# EAGLE board SparkFun_IoT_RedBoard-ESP32-Panel (EAGLE 9.6.2), part 1 of 9
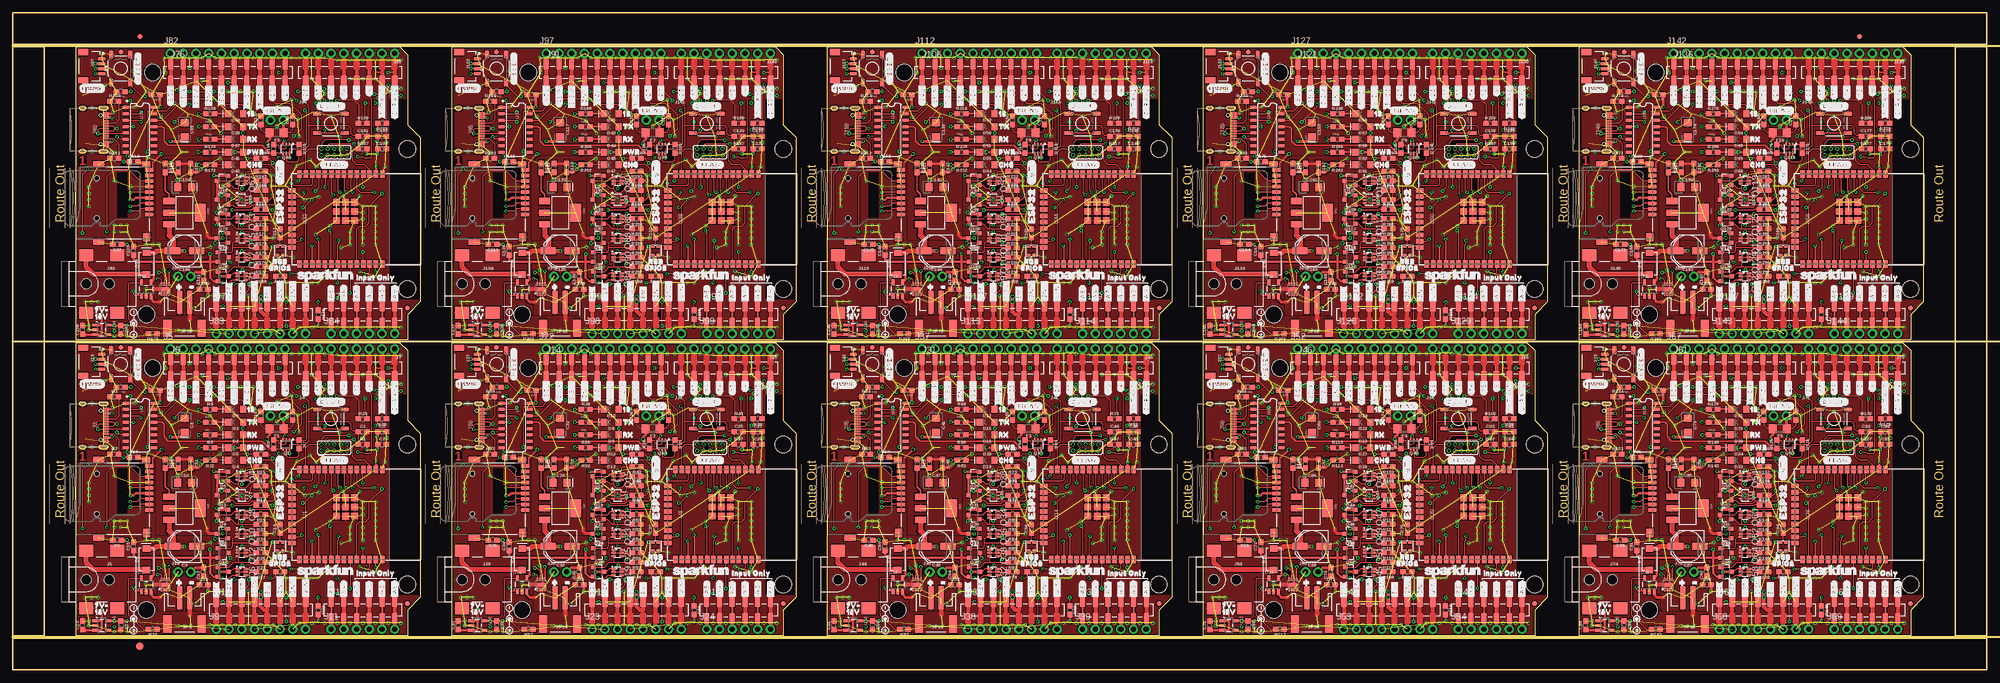
[diagram p0: board, top side]
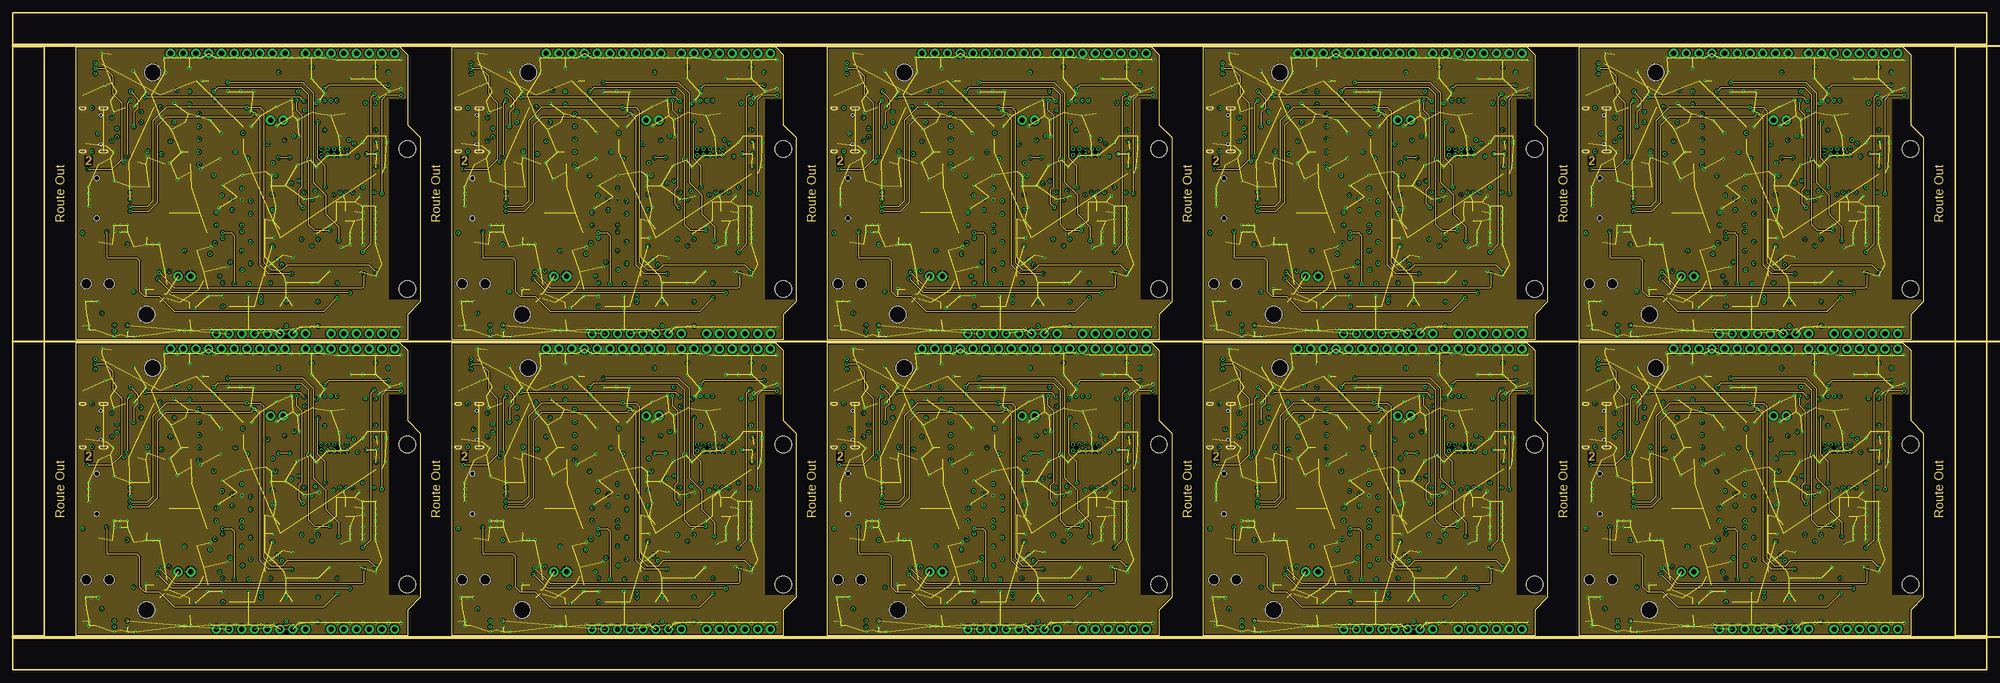
[diagram p1: board, inner layer Route2]
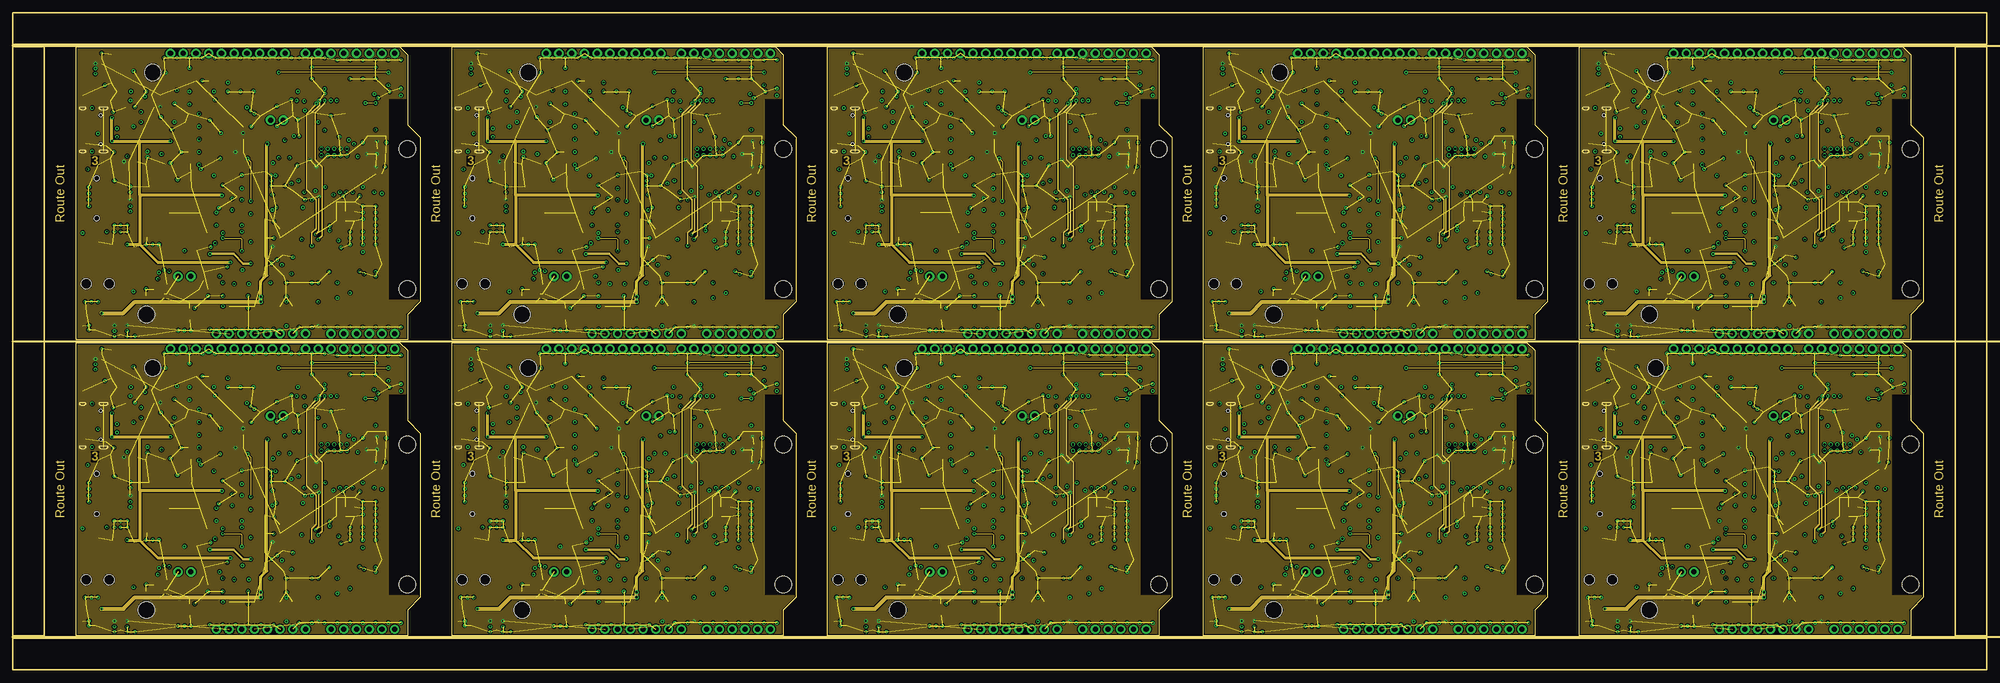
[diagram p2: board, inner layer Route15]
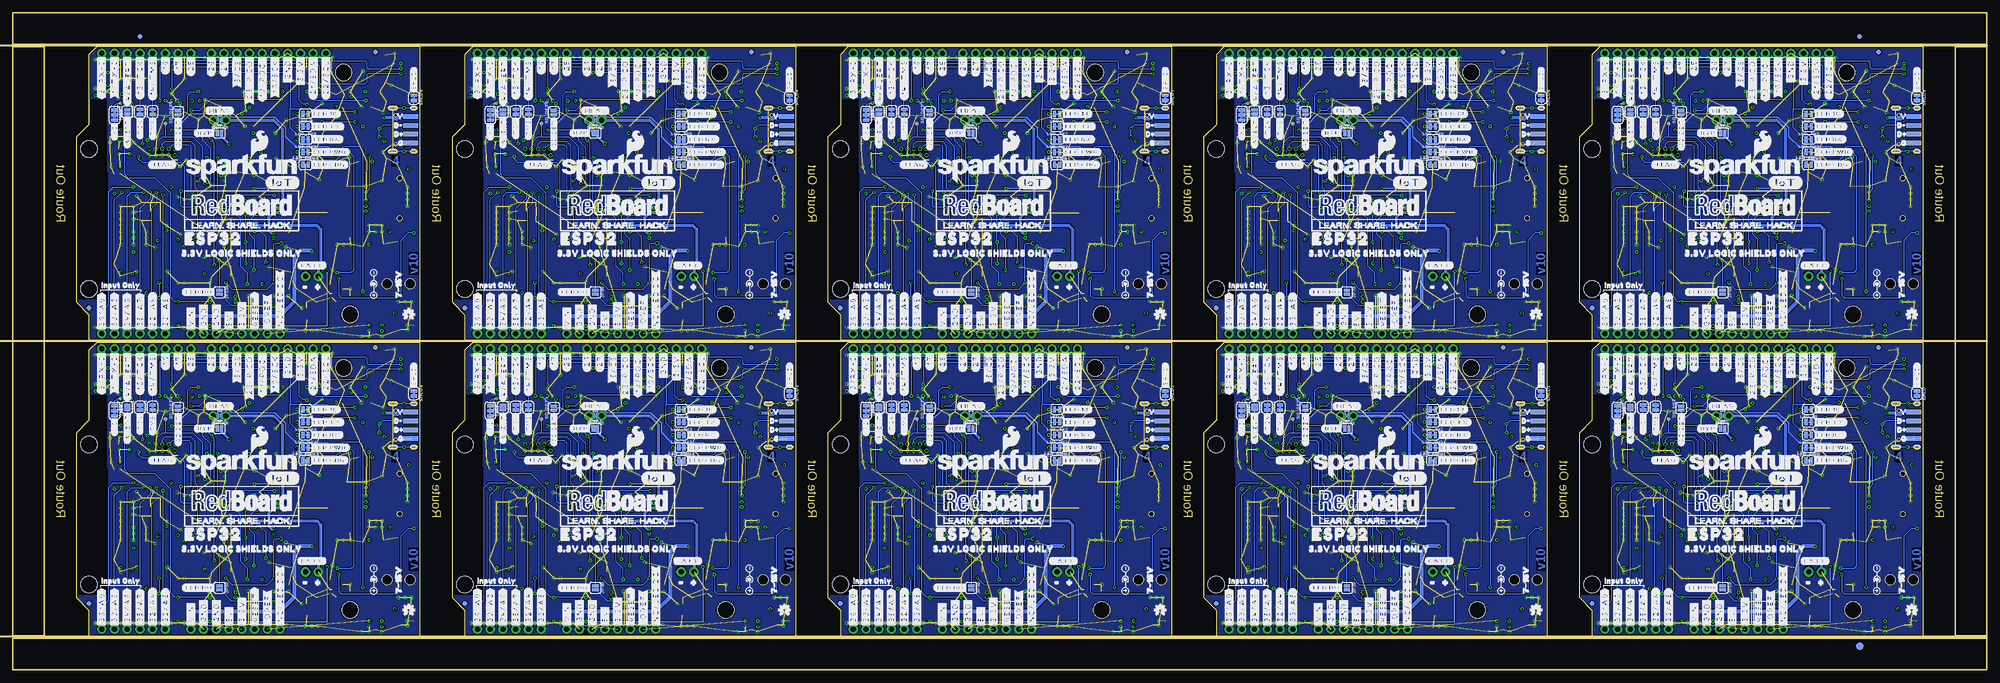
[diagram p3: board, bottom side, seen from below]

Size 393.7 x 131.06 mm. Coordinates in mm from the lower left corner, seen from the top.
Outline: 12.7,65.28 77.22,65.28 78.74,63.75 78.74,49.78 81.28,47.24 81.28,14.48 78.74,11.94 78.74,6.86 12.7,6.86 12.7,65.28
Outline: 87.63,65.28 152.15,65.28 153.67,63.75 153.67,49.78 156.21,47.24 156.21,14.48 153.67,11.94 153.67,6.86 87.63,6.86 87.63,65.28
Outline: 162.56,65.28 227.08,65.28 228.6,63.75 228.6,49.78 231.14,47.24 231.14,14.48 228.6,11.94 228.6,6.86 162.56,6.86 162.56,65.28
Outline: 237.49,65.28 302.01,65.28 303.53,63.75 303.53,49.78 306.07,47.24 306.07,14.48 303.53,11.94 303.53,6.86 237.49,6.86 237.49,65.28
Outline: 312.42,65.28 376.94,65.28 378.46,63.75 378.46,49.78 381,47.24 381,14.48 378.46,11.94 378.46,6.86 312.42,6.86 312.42,65.28
Outline: 12.7,124.21 77.22,124.21 78.74,122.68 78.74,108.71 81.28,106.17 81.28,73.41 78.74,70.87 78.74,65.79 12.7,65.79 12.7,124.21
Outline: 87.63,124.21 152.15,124.21 153.67,122.68 153.67,108.71 156.21,106.17 156.21,73.41 153.67,70.87 153.67,65.79 87.63,65.79 87.63,124.21
Outline: 162.56,124.21 227.08,124.21 228.6,122.68 228.6,108.71 231.14,106.17 231.14,73.41 228.6,70.87 228.6,65.79 162.56,65.79 162.56,124.21
Outline: 237.49,124.21 302.01,124.21 303.53,122.68 303.53,108.71 306.07,106.17 306.07,73.41 303.53,70.87 303.53,65.79 237.49,65.79 237.49,124.21
Outline: 312.42,124.21 376.94,124.21 378.46,122.68 378.46,108.71 381,106.17 381,73.41 378.46,70.87 378.46,65.79 312.42,65.79 312.42,124.21
Outline: 0,6.35 393.7,6.35 393.7,0 0,0 0,6.35
Outline: 387.35,124.21 393.7,124.21 393.7,6.86 387.35,6.86 387.35,124.21
Outline: 0,131.06 393.7,131.06 393.7,124.71 0,124.71 0,131.06
Outline: 0,124.21 6.35,124.21 6.35,6.86 0,6.86 0,124.21
Copper layers (1+2*15+16): Top 0.035559375mm / dielectric 0.47751875mm / Route2 0.035559375mm / dielectric 0.47751875mm / Route15 0.035559375mm / dielectric 0.47751875mm / Bottom 0.035559375mm
Design rules "SparkFun_IoT_RedBoard-ESP32": minimum track width 7mil, minimum drill 12mil, track to track 7mil, track to pad 7mil, pad to pad 7mil, via to via 7mil, smd to smd 7mil, copper to edge 7mil, drill to drill 7mil, minimum pad ring 7mil, minimum via ring 7mil, stop-mask expansion 3mil, vias tented up to drill 25mil, thermal gap 10mil
tRestrict: area 75.2,15 to 81.3,54.9; area 30.4,15.9 to 30.5,16.2; area 150.1,15 to 156.2,54.9; area 105.4,15.9 to 105.5,16.2; area 225,15 to 231.1,54.9; area 180.3,15.9 to 180.4,16.2; area 300,15 to 306.1,54.9; area 255.2,15.9 to 255.3,16.2; area 374.9,15 to 381,54.9; area 330.1,15.9 to 330.3,16.2; area 75.2,73.9 to 81.3,113.8; area 30.4,74.8 to 30.5,75.1; area 150.1,73.9 to 156.2,113.8; area 105.4,74.8 to 105.5,75.1; area 225,73.9 to 231.1,113.8; area 180.3,74.8 to 180.4,75.1; area 300,73.9 to 306.1,113.8; area 255.2,74.8 to 255.3,75.1; area 374.9,73.9 to 381,113.8; area 330.1,74.8 to 330.3,75.1
bRestrict: area 75.2,21.8 to 81.3,40.1; area 75.2,15 to 81.3,54.9; area 150.1,21.8 to 156.2,40.1; area 150.1,15 to 156.2,54.9; area 225,21.8 to 231.1,40.1; area 225,15 to 231.1,54.9; area 300,21.8 to 306.1,40.1; area 300,15 to 306.1,54.9; area 374.9,21.8 to 381,40.1; area 374.9,15 to 381,54.9; area 75.2,80.8 to 81.3,99.1; area 75.2,73.9 to 81.3,113.8; area 150.1,80.8 to 156.2,99.1; area 150.1,73.9 to 156.2,113.8; area 225,80.8 to 231.1,99.1; area 225,73.9 to 231.1,113.8; area 300,80.8 to 306.1,99.1; area 300,73.9 to 306.1,113.8; area 374.9,80.8 to 381,99.1; area 374.9,73.9 to 381,113.8
Milling: 3 lines

## Footprints (pad centres in the part's own frame; a part is rotated, then mirrored left to right if it is on the bottom)
SMT-JUMPER_2_NO_SILK = smd 0.635 x 1.27: 1 -0.406,0; 2 0.406,0
0603 = smd 1.1 x 1: 1 -0.85,0; 2 0.85,0
EIA3216 = smd 1.4 x 1.6: + 1.4,0; - -1.4,0
PANASONIC_D = smd 3 x 1.4: + 2.4,0; - -2.4,0
SMA-DIODE = smd 1.27 x 1.47: A -2.15,0; C 2.15,0
LED-1206 = smd 1.2 x 1.4: A -1.5,0; C 1.5,0
WS2812-2020 = smd 0.7 x 0.7: DI -0.915,0.55; DO 0.915,-0.55; GND 0.915,0.55; VCC -0.915,-0.55
TACTILE_SWITCH_SMD_5.2MM = smd 1.524 x 0.762: 1 -2.794,1.905; 2 2.794,1.905; 3 -2.794,-1.905; 4 2.794,-1.905
FIDUCIAL-1X2 = smd 1 x 1: 1 0,0
FIDUCIAL-1.5X3 = smd 1.5 x 1.5: 1 0,0
1206 = smd 1.6 x 1.8: 1 -1.4,0; 2 1.4,0
SMT-JUMPER_3_2-NC_TRACE_SILK = smd 0.66 x 1.27: 1 -1.041,0; 2 0,0; 3 1.041,0
POWER_JACK_SMD = smd 2.8 x 2.4: GND 0,-5.7; P$4 6.1,-5.7; VIN0 0,5.7; VIN1 6.1,5.7 | hole 2.032: 0,0; 4.572,0
USB-C-16P-4LAYER-ISOLATED = smd 0.3 x 1: A5 -1.25,-0.34; A6 -0.25,-0.34; A7 0.25,-0.34; A8 1.25,-0.34; B5 1.75,-0.34; B6 0.75,-0.34; B7 -0.75,-0.34; B8 -1.75,-0.34 | smd 0.6 x 1: GND -3.225,-0.34; GND2 3.225,-0.34; VBUS1 -2.45,-0.34; VBUS2 2.45,-0.34 | smd 1 x 2.1: SHLD1 -4.32,-0.915; SHLD2 4.32,-0.915 | smd 1 x 2.1 bottom: SHLD3 -4.32,-0.915; SHLD4 4.32,-0.915 | smd 1 x 1.6: SHLD5 -4.32,-5.095; SHLD8 4.32,-5.095 | smd 1 x 1.6 bottom: SHLD6 -4.32,-5.095; SHLD7 4.32,-5.095 | hole 0.65: -2.89,-1.445; 2.89,-1.445
USB-SOLDER-PADS = smd 3 x 0.9: D+ 0,-0.889; D- 0,0.889; GND 0,-2.667; VBUS 0,2.667
2X5_PTH_SILK_.05 = drill 0.432: 1 0,0; 2 0,1.27; 3 1.27,0; 4 1.27,1.27; 5 2.54,0; 6 2.54,1.27; 7 3.81,0; 8 3.81,1.27; 9 5.08,0; 10 5.08,1.27
1X10_NO_SILK = drill 1.016 pad 1.88: 1 0,0; 2 2.54,0; 3 5.08,0; 4 7.62,0; 5 10.16,0; 6 12.7,0; 7 15.24,0; 8 17.78,0; 9 20.32,0; 10 22.86,0
1X10_SMD_COMBINED = smd 1 x 2: 1A 0,1.65; 1B 0,-1.65; 2A 2.54,1.65; 2B 2.54,-1.65; 3A 5.08,1.65; 3B 5.08,-1.65; 4A 7.62,1.65; 4B 7.62,-1.65; 5A 10.16,1.65; 5B 10.16,-1.65; 6A 12.7,1.65; 6B 12.7,-1.65; 7A 15.24,1.65; 7B 15.24,-1.65; 8A 17.78,1.65; 8B 17.78,-1.65; 9A 20.32,1.65; 9B 20.32,-1.65; 10A 22.86,1.65; 10B 22.86,-1.65
1X08_NO_SILK = drill 1.016 pad 1.88: 1 0,0; 2 2.54,0; 3 5.08,0; 4 7.62,0; 5 10.16,0; 6 12.7,0; 7 15.24,0; 8 17.78,0
1X08_SMD_COMBINED = smd 1 x 2: 1 0,1.65; 2 2.54,1.65; 3 5.08,1.65; 4 7.62,1.652; 5 10.16,1.65; 6 12.7,1.652; 7 15.24,1.65; 8 17.78,1.652
1X06_NO_SILK = drill 1.016 pad 1.88: 1 0,0; 2 2.54,0; 3 5.08,0; 4 7.62,0; 5 10.16,0; 6 12.7,0
1X06_SMD_STRAIGHT_COMBO = smd 1 x 2: 1 0,-1.65; 1-2 0,1.65; 2 2.54,1.65; 2-2 2.54,-1.65; 3 5.08,-1.65; 3-2 5.08,1.65; 4 7.62,1.65; 4-2 7.62,-1.65; 5 10.16,-1.65; 5-2 10.16,1.65; 6 12.7,1.65; 6-2 12.7,-1.65
JST04_1MM_RA = smd 0.6 x 1.35: 1 -1.5,0; 2 -0.5,0; 3 0.5,0; 4 1.5,0 | smd 1.2 x 2: NC1 2.8,-3.675; NC2 -2.8,-3.675
MICROSD-EXTERNALPIN = smd 0.7 x 1.6: 1 2.25,10.5; 2 1.15,10.5; 3 0.05,10.5; 4 -1.05,10.5; 5 -2.15,10.5; 6 -3.25,10.5; 7 -4.35,10.5; 8 -5.45,10.5; 9 -6.55,10.5 | smd 1.2 x 1.6: 10 -7.75,9.9 | smd 1.2 x 2.2: 11 -7.75,0.4; 12 7.75,0.4 | smd 1.6 x 1.4: 13 6.85,10 | hole 1: 3.05,0; -4.95,0
1X02_NO_SILK = drill 1.016 pad 1.88: 1 0,0; 2 2.54,0
JST-2-SMD = smd 1 x 4.6: 1 -1,-3.7; 2 1,-3.7 | smd 1.6 x 3.4: NC1 -3.4,1.5; NC2 3.4,1.5
STAND-OFF = hole 3.302: 0,0
SMT-JUMPER_2_NC_TRACE_SILK = smd 0.66 x 1.27: 1 -0.521,0; 2 0.521,0
COMBO-JUMPER_2_NC_TRACE = smd 0.635 x 1.27: 1 -0.508,0; 2 0.508,0 | drill 1.016 pad 1.88: 3 -1.27,0; 4 1.27,0
SC70-6 = smd 0.3 x 0.66: 1 -0.65,-0.92; 2 0,-0.92; 3 0.65,-0.92; 4 0.65,0.92; 5 0,0.92; 6 -0.65,0.92
SOT23-3 = smd 0.8 x 0.9: 1 -0.95,-1; 2 0.95,-1; 3 0,1.1
SOT363_PHILIPS = smd 0.4 x 0.8: 1 -0.65,-0.8; 2 0,-0.8; 3 0.65,-0.8; 4 0.65,0.8; 5 0,0.8; 6 -0.65,0.8
PAD.03X.03 = smd 0.762 x 0.762: 1 0,0
ESP-WROOM-32D = smd 0.9 x 1.5: 1 6.43,9; 2 5.16,9; 3 3.89,9; 4 2.62,9; 5 1.35,9; 6 0.08,9; 7 -1.19,9; 8 -2.46,9; 9 -3.73,9; 10 -5,9; 11 -6.27,9; 12 -7.54,9; 13 -8.81,9; 14 -10.08,9; 25 -10.08,-9; 26 -8.81,-9; 27 -7.54,-9; 28 -6.27,-9; 29 -5,-9; 30 -3.73,-9; 31 -2.46,-9; 32 -1.19,-9; 33 0.08,-9; 34 1.35,-9; 35 2.62,-9; 36 3.89,-9; 37 5.16,-9; 38 6.43,-9 | smd 1.5 x 0.9: 15 -11.57,5.715; 16 -11.57,4.445; 17 -11.57,3.175; 18 -11.57,1.905; 19 -11.57,0.635; 20 -11.57,-0.635; 21 -11.57,-1.905; 22 -11.57,-3.175; 23 -11.57,-4.445; 24 -11.57,-5.715 | smd 1.33 x 1.33: GND -0.912,1.531; GNDT1 -2.751,3.346; GNDT2 -2.761,1.516; GNDT3 -2.751,-0.314; GNDT4 -0.891,-0.324; GNDT5 0.909,-0.314; GNDT6 0.909,1.516; GNDT7 0.909,3.346; GNDT8 -0.921,3.346
SO016 = smd 0.6 x 1.2: 1 -4.445,-2.8; 2 -3.175,-2.8; 3 -1.905,-2.8; 4 -0.635,-2.8; 5 0.635,-2.8; 6 1.905,-2.8; 7 3.175,-2.8; 8 4.445,-2.8; 9 4.445,2.8; 10 3.175,2.8; 11 1.905,2.8; 12 0.635,2.8; 13 -0.635,2.8; 14 -1.905,2.8; 15 -3.175,2.8; 16 -4.445,2.8
SOT223 = smd 1.219 x 2.235: 1 -2.311,-3.099; 2 0,-3.099; 3 2.311,-3.099 | smd 3.6 x 2.2: 4 0,3.099
SOT23-5 = smd 0.55 x 1.2: 1 -0.95,-1.3; 2 0,-1.3; 3 0.95,-1.3; 4 0.95,1.3; 5 -0.95,1.3
DFN-8 = smd 0.3 x 0.7: 1 -0.75,-0.99; 2 -0.25,-0.99; 3 0.25,-0.99; 4 0.75,-0.99; 5 0.75,0.99; 6 0.25,0.99; 7 -0.25,0.99; 8 -0.75,0.99 | smd 1.38 x 0.8: 9 0,0

## Placement (x,y rotation side)
!ALERT!  JUMPER-SMT_2_NO_SILK  [SMT-JUMPER_2_NO_SILK]  71.12,52.32 90 bottom
!ALERT!1  JUMPER-SMT_2_NO_SILK  [SMT-JUMPER_2_NO_SILK]  146.05,52.32 90 bottom
!ALERT!2  JUMPER-SMT_2_NO_SILK  [SMT-JUMPER_2_NO_SILK]  220.98,52.32 90 bottom
!ALERT!3  JUMPER-SMT_2_NO_SILK  [SMT-JUMPER_2_NO_SILK]  295.91,52.32 90 bottom
!ALERT!4  JUMPER-SMT_2_NO_SILK  [SMT-JUMPER_2_NO_SILK]  370.84,52.32 90 bottom
!ALERT!5  JUMPER-SMT_2_NO_SILK  [SMT-JUMPER_2_NO_SILK]  71.12,111.25 90 bottom
!ALERT!6  JUMPER-SMT_2_NO_SILK  [SMT-JUMPER_2_NO_SILK]  146.05,111.25 90 bottom
!ALERT!7  JUMPER-SMT_2_NO_SILK  [SMT-JUMPER_2_NO_SILK]  220.98,111.25 90 bottom
!ALERT!8  JUMPER-SMT_2_NO_SILK  [SMT-JUMPER_2_NO_SILK]  295.91,111.25 90 bottom
!ALERT!9  JUMPER-SMT_2_NO_SILK  [SMT-JUMPER_2_NO_SILK]  370.84,111.25 90 bottom
BYP  JUMPER-SMT_2_NO_SILK  [SMT-JUMPER_2_NO_SILK]  52.7,48.13 0 bottom
BYP1  JUMPER-SMT_2_NO_SILK  [SMT-JUMPER_2_NO_SILK]  127.64,48.13 0 bottom
BYP2  JUMPER-SMT_2_NO_SILK  [SMT-JUMPER_2_NO_SILK]  202.56,48.13 0 bottom
BYP3  JUMPER-SMT_2_NO_SILK  [SMT-JUMPER_2_NO_SILK]  277.5,48.13 0 bottom
BYP4  JUMPER-SMT_2_NO_SILK  [SMT-JUMPER_2_NO_SILK]  352.43,48.13 0 bottom
BYP5  JUMPER-SMT_2_NO_SILK  [SMT-JUMPER_2_NO_SILK]  52.7,107.06 0 bottom
BYP6  JUMPER-SMT_2_NO_SILK  [SMT-JUMPER_2_NO_SILK]  127.64,107.06 0 bottom
BYP7  JUMPER-SMT_2_NO_SILK  [SMT-JUMPER_2_NO_SILK]  202.56,107.06 0 bottom
BYP8  JUMPER-SMT_2_NO_SILK  [SMT-JUMPER_2_NO_SILK]  277.5,107.06 0 bottom
BYP9  JUMPER-SMT_2_NO_SILK  [SMT-JUMPER_2_NO_SILK]  352.43,107.06 0 bottom
C1  0.1uF  [0603]  69.85,47.5 0 top
C2  0.1uF  [0603]  73.66,44.96 0 top
C3  10uF  [0603]  73.66,47.5 0 top
C4  0.1uF  [0603]  55.88,50.67 90 top
C5  0.1uF  [0603]  20.83,25.91 180 top
C6  10uF  [EIA3216]  34.29,48.77 270 top
C7  0.1uF  [0603]  28.57,55.75 180 top
C8  10nF  [0603]  21.59,56.39 180 top
C9  47uF  [PANASONIC_D]  34.29,24.64 180 top
C10  10uF  [EIA3216]  34.29,37.34 0 top
C11  0.1uF  [0603]  35.56,41.15 270 top
C12  0.1uF  [0603]  13.97,8.89 90 top
C13  0.1uF  [0603]  21.59,8.89 270 top
C14  0.1uF  [0603]  53.34,28.13 90 top
C15  4.7uF  [0603]  24.13,24.64 90 top
C16  4.7uF  [0603]  38.1,17.02 0 top
C17  0.1uF  [0603]  38.1,19.56 90 top
C18  0.1uF  [0603]  49.53,50.67 90 top
C19  10uF  [0603]  24.13,42.42 0 top
C20  0.1uF  [0603]  130.81,50.67 90 top
C21  0.1uF  [0603]  95.76,25.91 180 top
C22  10uF  [EIA3216]  109.22,48.77 270 top
C23  10nF  [0603]  96.52,56.39 180 top
C24  0.1uF  [0603]  103.51,55.75 180 top
C25  0.1uF  [0603]  144.78,47.5 0 top
C26  0.1uF  [0603]  148.59,44.96 0 top
C27  10uF  [0603]  148.59,47.5 0 top
C28  10uF  [EIA3216]  109.22,37.34 0 top
C29  0.1uF  [0603]  110.49,41.15 270 top
C30  47uF  [PANASONIC_D]  109.22,24.64 180 top
C31  0.1uF  [0603]  96.52,8.89 270 top
C32  0.1uF  [0603]  88.9,8.89 90 top
C33  4.7uF  [0603]  113.03,17.02 0 top
C34  4.7uF  [0603]  99.06,24.64 90 top
C35  0.1uF  [0603]  113.03,19.56 90 top
C36  0.1uF  [0603]  124.46,50.67 90 top
C37  0.1uF  [0603]  128.27,28.13 90 top
C38  10uF  [0603]  99.06,42.42 0 top
C39  0.1uF  [0603]  205.74,50.67 90 top
C40  0.1uF  [0603]  170.69,25.91 180 top
C41  10uF  [EIA3216]  184.15,48.77 270 top
C42  10nF  [0603]  171.45,56.39 180 top
C43  0.1uF  [0603]  178.44,55.75 180 top
C44  0.1uF  [0603]  219.71,47.5 0 top
C45  0.1uF  [0603]  223.52,44.96 0 top
C46  10uF  [0603]  223.52,47.5 0 top
C47  10uF  [EIA3216]  184.15,37.34 0 top
C48  0.1uF  [0603]  185.42,41.15 270 top
C49  47uF  [PANASONIC_D]  184.15,24.64 180 top
C50  0.1uF  [0603]  171.45,8.89 270 top
C51  0.1uF  [0603]  163.83,8.89 90 top
C52  4.7uF  [0603]  187.96,17.02 0 top
C53  4.7uF  [0603]  173.99,24.64 90 top
C54  0.1uF  [0603]  187.96,19.56 90 top
C55  0.1uF  [0603]  199.39,50.67 90 top
C56  0.1uF  [0603]  203.2,28.13 90 top
C57  10uF  [0603]  173.99,42.42 0 top
C58  0.1uF  [0603]  280.67,50.67 90 top
C59  0.1uF  [0603]  245.62,25.91 180 top
C60  10uF  [EIA3216]  259.08,48.77 270 top
C61  10nF  [0603]  246.38,56.39 180 top
C62  0.1uF  [0603]  253.36,55.75 180 top
C63  0.1uF  [0603]  294.64,47.5 0 top
C64  0.1uF  [0603]  298.45,44.96 0 top
C65  10uF  [0603]  298.45,47.5 0 top
C66  10uF  [EIA3216]  259.08,37.34 0 top
C67  0.1uF  [0603]  260.35,41.15 270 top
C68  47uF  [PANASONIC_D]  259.08,24.64 180 top
C69  0.1uF  [0603]  246.38,8.89 270 top
C70  0.1uF  [0603]  238.76,8.89 90 top
C71  4.7uF  [0603]  262.89,17.02 0 top
C72  4.7uF  [0603]  248.92,24.64 90 top
C73  0.1uF  [0603]  262.89,19.56 90 top
C74  0.1uF  [0603]  274.32,50.67 90 top
C75  0.1uF  [0603]  278.13,28.13 90 top
C76  10uF  [0603]  248.92,42.42 0 top
C77  0.1uF  [0603]  355.6,50.67 90 top
C78  0.1uF  [0603]  320.55,25.91 180 top
C79  10uF  [EIA3216]  334.01,48.77 270 top
C80  10nF  [0603]  321.31,56.39 180 top
C81  0.1uF  [0603]  328.3,55.75 180 top
C82  0.1uF  [0603]  369.57,47.5 0 top
C83  0.1uF  [0603]  373.38,44.96 0 top
C84  10uF  [0603]  373.38,47.5 0 top
C85  10uF  [EIA3216]  334.01,37.34 0 top
C86  0.1uF  [0603]  335.28,41.15 270 top
C87  47uF  [PANASONIC_D]  334.01,24.64 180 top
C88  0.1uF  [0603]  321.31,8.89 270 top
C89  0.1uF  [0603]  313.69,8.89 90 top
C90  4.7uF  [0603]  337.82,17.02 0 top
C91  4.7uF  [0603]  323.85,24.64 90 top
C92  0.1uF  [0603]  337.82,19.56 90 top
C93  0.1uF  [0603]  349.25,50.67 90 top
C94  0.1uF  [0603]  353.06,28.13 90 top
C95  10uF  [0603]  323.85,42.42 0 top
C96  0.1uF  [0603]  55.88,109.6 90 top
C97  0.1uF  [0603]  20.83,84.84 180 top
C98  10uF  [EIA3216]  34.29,107.7 270 top
C99  10nF  [0603]  21.59,115.32 180 top
C100  0.1uF  [0603]  28.57,114.68 180 top
C101  0.1uF  [0603]  69.85,106.43 0 top
C102  0.1uF  [0603]  73.66,103.89 0 top
C103  10uF  [0603]  73.66,106.43 0 top
C104  10uF  [EIA3216]  34.29,96.27 0 top
C105  0.1uF  [0603]  35.56,100.08 270 top
C106  47uF  [PANASONIC_D]  34.29,83.57 180 top
C107  0.1uF  [0603]  21.59,67.82 270 top
C108  0.1uF  [0603]  13.97,67.82 90 top
C109  4.7uF  [0603]  38.1,75.95 0 top
C110  4.7uF  [0603]  24.13,83.57 90 top
C111  0.1uF  [0603]  38.1,78.49 90 top
C112  0.1uF  [0603]  49.53,109.6 90 top
C113  0.1uF  [0603]  53.34,87.06 90 top
C114  10uF  [0603]  24.13,101.35 0 top
C115  0.1uF  [0603]  130.81,109.6 90 top
C116  0.1uF  [0603]  95.76,84.84 180 top
C117  10uF  [EIA3216]  109.22,107.7 270 top
C118  10nF  [0603]  96.52,115.32 180 top
C119  0.1uF  [0603]  103.51,114.68 180 top
C120  0.1uF  [0603]  144.78,106.43 0 top
C121  0.1uF  [0603]  148.59,103.89 0 top
C122  10uF  [0603]  148.59,106.43 0 top
C123  10uF  [EIA3216]  109.22,96.27 0 top
C124  0.1uF  [0603]  110.49,100.08 270 top
C125  47uF  [PANASONIC_D]  109.22,83.57 180 top
C126  0.1uF  [0603]  96.52,67.82 270 top
C127  0.1uF  [0603]  88.9,67.82 90 top
C128  4.7uF  [0603]  113.03,75.95 0 top
C129  4.7uF  [0603]  99.06,83.57 90 top
C130  0.1uF  [0603]  113.03,78.49 90 top
C131  0.1uF  [0603]  124.46,109.6 90 top
C132  0.1uF  [0603]  128.27,87.06 90 top
C133  10uF  [0603]  99.06,101.35 0 top
C134  0.1uF  [0603]  205.74,109.6 90 top
C135  0.1uF  [0603]  170.69,84.84 180 top
C136  10uF  [EIA3216]  184.15,107.7 270 top
C137  10nF  [0603]  171.45,115.32 180 top
C138  0.1uF  [0603]  178.44,114.68 180 top
C139  0.1uF  [0603]  219.71,106.43 0 top
C140  0.1uF  [0603]  223.52,103.89 0 top
C141  10uF  [0603]  223.52,106.43 0 top
C142  10uF  [EIA3216]  184.15,96.27 0 top
C143  0.1uF  [0603]  185.42,100.08 270 top
C144  47uF  [PANASONIC_D]  184.15,83.57 180 top
C145  0.1uF  [0603]  171.45,67.82 270 top
C146  0.1uF  [0603]  163.83,67.82 90 top
C147  4.7uF  [0603]  187.96,75.95 0 top
C148  4.7uF  [0603]  173.99,83.57 90 top
C149  0.1uF  [0603]  187.96,78.49 90 top
C150  0.1uF  [0603]  199.39,109.6 90 top
C151  0.1uF  [0603]  203.2,87.06 90 top
C152  10uF  [0603]  173.99,101.35 0 top
C153  0.1uF  [0603]  280.67,109.6 90 top
C154  0.1uF  [0603]  245.62,84.84 180 top
C155  10uF  [EIA3216]  259.08,107.7 270 top
C156  10nF  [0603]  246.38,115.32 180 top
C157  0.1uF  [0603]  253.36,114.68 180 top
C158  0.1uF  [0603]  294.64,106.43 0 top
C159  0.1uF  [0603]  298.45,103.89 0 top
C160  10uF  [0603]  298.45,106.43 0 top
C161  10uF  [EIA3216]  259.08,96.27 0 top
C162  0.1uF  [0603]  260.35,100.08 270 top
C163  47uF  [PANASONIC_D]  259.08,83.57 180 top
C164  0.1uF  [0603]  246.38,67.82 270 top
C165  0.1uF  [0603]  238.76,67.82 90 top
C166  4.7uF  [0603]  262.89,75.95 0 top
C167  4.7uF  [0603]  248.92,83.57 90 top
C168  0.1uF  [0603]  262.89,78.49 90 top
C169  0.1uF  [0603]  274.32,109.6 90 top
C170  0.1uF  [0603]  278.13,87.06 90 top
C171  10uF  [0603]  248.92,101.35 0 top
C172  0.1uF  [0603]  355.6,109.6 90 top
C173  0.1uF  [0603]  320.55,84.84 180 top
C174  10uF  [EIA3216]  334.01,107.7 270 top
C175  10nF  [0603]  321.31,115.32 180 top
C176  0.1uF  [0603]  328.3,114.68 180 top
C177  0.1uF  [0603]  369.57,106.43 0 top
C178  0.1uF  [0603]  373.38,103.89 0 top
C179  10uF  [0603]  373.38,106.43 0 top
C180  10uF  [EIA3216]  334.01,96.27 0 top
C181  0.1uF  [0603]  335.28,100.08 270 top
C182  47uF  [PANASONIC_D]  334.01,83.57 180 top
C183  0.1uF  [0603]  321.31,67.82 270 top
C184  0.1uF  [0603]  313.69,67.82 90 top
C185  4.7uF  [0603]  337.82,75.95 0 top
C186  4.7uF  [0603]  323.85,83.57 90 top
C187  0.1uF  [0603]  337.82,78.49 90 top
C188  0.1uF  [0603]  349.25,109.6 90 top
C189  0.1uF  [0603]  353.06,87.06 90 top
C190  10uF  [0603]  323.85,101.35 0 top
D1  3A/40V/500mV  [SMA-DIODE]  26.67,22.1 90 top
D2  GREEN  [LED-1206]  44.45,49.4 180 top
D3  Yellow  [LED-1206]  44.45,46.86 180 top
D4  Yellow  [LED-1206]  44.45,41.78 180 top
D5  RED  [LED-1206]  44.45,44.32 180 top
D6  BLUE  [LED-1206]  44.45,51.94 180 top
D7  WS2812_2020  [WS2812-2020]  53.34,24.64 270 top
D8  GREEN  [LED-1206]  119.38,49.4 180 top
D9  Yellow  [LED-1206]  119.38,46.86 180 top
D10  BLUE  [LED-1206]  119.38,51.94 180 top
D11  3A/40V/500mV  [SMA-DIODE]  101.6,22.1 90 top
D12  Yellow  [LED-1206]  119.38,41.78 180 top
D13  RED  [LED-1206]  119.38,44.32 180 top
D14  WS2812_2020  [WS2812-2020]  128.27,24.64 270 top
D15  GREEN  [LED-1206]  194.31,49.4 180 top
D16  Yellow  [LED-1206]  194.31,46.86 180 top
D17  BLUE  [LED-1206]  194.31,51.94 180 top
D18  3A/40V/500mV  [SMA-DIODE]  176.53,22.1 90 top
D19  Yellow  [LED-1206]  194.31,41.78 180 top
D20  RED  [LED-1206]  194.31,44.32 180 top
D21  WS2812_2020  [WS2812-2020]  203.2,24.64 270 top
D22  GREEN  [LED-1206]  269.24,49.4 180 top
D23  Yellow  [LED-1206]  269.24,46.86 180 top
D24  BLUE  [LED-1206]  269.24,51.94 180 top
D25  3A/40V/500mV  [SMA-DIODE]  251.46,22.1 90 top
D26  Yellow  [LED-1206]  269.24,41.78 180 top
D27  RED  [LED-1206]  269.24,44.32 180 top
D28  WS2812_2020  [WS2812-2020]  278.13,24.64 270 top
D29  GREEN  [LED-1206]  344.17,49.4 180 top
D30  Yellow  [LED-1206]  344.17,46.86 180 top
D31  BLUE  [LED-1206]  344.17,51.94 180 top
D32  3A/40V/500mV  [SMA-DIODE]  326.39,22.1 90 top
D33  Yellow  [LED-1206]  344.17,41.78 180 top
D34  RED  [LED-1206]  344.17,44.32 180 top
D35  WS2812_2020  [WS2812-2020]  353.06,24.64 270 top
D36  GREEN  [LED-1206]  44.45,108.33 180 top
D37  Yellow  [LED-1206]  44.45,105.79 180 top
D38  BLUE  [LED-1206]  44.45,110.87 180 top
D39  3A/40V/500mV  [SMA-DIODE]  26.67,81.03 90 top
D40  Yellow  [LED-1206]  44.45,100.71 180 top
D41  RED  [LED-1206]  44.45,103.25 180 top
D42  WS2812_2020  [WS2812-2020]  53.34,83.57 270 top
D43  GREEN  [LED-1206]  119.38,108.33 180 top
D44  Yellow  [LED-1206]  119.38,105.79 180 top
D45  BLUE  [LED-1206]  119.38,110.87 180 top
D46  3A/40V/500mV  [SMA-DIODE]  101.6,81.03 90 top
D47  Yellow  [LED-1206]  119.38,100.71 180 top
D48  RED  [LED-1206]  119.38,103.25 180 top
D49  WS2812_2020  [WS2812-2020]  128.27,83.57 270 top
D50  GREEN  [LED-1206]  194.31,108.33 180 top
D51  Yellow  [LED-1206]  194.31,105.79 180 top
D52  BLUE  [LED-1206]  194.31,110.87 180 top
D53  3A/40V/500mV  [SMA-DIODE]  176.53,81.03 90 top
D54  Yellow  [LED-1206]  194.31,100.71 180 top
D55  RED  [LED-1206]  194.31,103.25 180 top
D56  WS2812_2020  [WS2812-2020]  203.2,83.57 270 top
D57  GREEN  [LED-1206]  269.24,108.33 180 top
D58  Yellow  [LED-1206]  269.24,105.79 180 top
D59  BLUE  [LED-1206]  269.24,110.87 180 top
D60  3A/40V/500mV  [SMA-DIODE]  251.46,81.03 90 top
D61  Yellow  [LED-1206]  269.24,100.71 180 top
D62  RED  [LED-1206]  269.24,103.25 180 top
D63  WS2812_2020  [WS2812-2020]  278.13,83.57 270 top
D64  GREEN  [LED-1206]  344.17,108.33 180 top
D65  Yellow  [LED-1206]  344.17,105.79 180 top
D66  BLUE  [LED-1206]  344.17,110.87 180 top
D67  3A/40V/500mV  [SMA-DIODE]  326.39,81.03 90 top
D68  Yellow  [LED-1206]  344.17,100.71 180 top
D69  RED  [LED-1206]  344.17,103.25 180 top
D70  WS2812_2020  [WS2812-2020]  353.06,83.57 270 top
DOOT  GPIO0  [TACTILE_SWITCH_SMD_5.2MM]  63.5,50.04 0 top
DOOT1  GPIO0  [TACTILE_SWITCH_SMD_5.2MM]  138.43,50.04 0 top
DOOT2  GPIO0  [TACTILE_SWITCH_SMD_5.2MM]  213.36,50.04 0 top
DOOT3  GPIO0  [TACTILE_SWITCH_SMD_5.2MM]  288.29,50.04 0 top
DOOT4  GPIO0  [TACTILE_SWITCH_SMD_5.2MM]  363.22,50.04 0 top
DOOT5  GPIO0  [TACTILE_SWITCH_SMD_5.2MM]  63.5,108.97 0 top
DOOT6  GPIO0  [TACTILE_SWITCH_SMD_5.2MM]  138.43,108.97 0 top
DOOT7  GPIO0  [TACTILE_SWITCH_SMD_5.2MM]  213.36,108.97 0 top
DOOT8  GPIO0  [TACTILE_SWITCH_SMD_5.2MM]  288.29,108.97 0 top
DOOT9  GPIO0  [TACTILE_SWITCH_SMD_5.2MM]  363.22,108.97 0 top
E$1  [FIDUCIAL-1X2]  25.4,126.3 0 top
E$2  [FIDUCIAL-1X2]  25.4,126.3 0 bottom
E$3  [FIDUCIAL-1X2]  368.3,126.3 0 top
E$4  [FIDUCIAL-1X2]  368.3,126.3 0 bottom
E$5  [FIDUCIAL-1.5X3]  25.4,4.76 0 top
E$6  [FIDUCIAL-1.5X3]  25.4,4.76 0 bottom
F1  6V/0.75A/1.5A  [1206]  52.7,48.13 180 top
F2  6V/0.75A/1.5A  [1206]  127.64,48.13 180 top
F3  6V/0.75A/1.5A  [1206]  202.56,48.13 180 top
F4  6V/0.75A/1.5A  [1206]  277.5,48.13 180 top
F5  6V/0.75A/1.5A  [1206]  352.43,48.13 180 top
F6  6V/0.75A/1.5A  [1206]  52.7,107.06 180 top
F7  6V/0.75A/1.5A  [1206]  127.64,107.06 180 top
F8  6V/0.75A/1.5A  [1206]  202.56,107.06 180 top
F9  6V/0.75A/1.5A  [1206]  277.5,107.06 180 top
F10  6V/0.75A/1.5A  [1206]  352.43,107.06 180 top
I2C  JUMPER-SMT_3_2-NC_TRACE_SILK  [SMT-JUMPER_3_2-NC_TRACE_SILK]  73.66,51.69 270 bottom
I2C1  JUMPER-SMT_3_2-NC_TRACE_SILK  [SMT-JUMPER_3_2-NC_TRACE_SILK]  148.59,51.69 270 bottom
I2C2  JUMPER-SMT_3_2-NC_TRACE_SILK  [SMT-JUMPER_3_2-NC_TRACE_SILK]  223.52,51.69 270 bottom
I2C3  JUMPER-SMT_3_2-NC_TRACE_SILK  [SMT-JUMPER_3_2-NC_TRACE_SILK]  298.45,51.69 270 bottom
I2C4  JUMPER-SMT_3_2-NC_TRACE_SILK  [SMT-JUMPER_3_2-NC_TRACE_SILK]  373.38,51.69 270 bottom
I2C5  JUMPER-SMT_3_2-NC_TRACE_SILK  [SMT-JUMPER_3_2-NC_TRACE_SILK]  73.66,110.62 270 bottom
I2C6  JUMPER-SMT_3_2-NC_TRACE_SILK  [SMT-JUMPER_3_2-NC_TRACE_SILK]  148.59,110.62 270 bottom
I2C7  JUMPER-SMT_3_2-NC_TRACE_SILK  [SMT-JUMPER_3_2-NC_TRACE_SILK]  223.52,110.62 270 bottom
I2C8  JUMPER-SMT_3_2-NC_TRACE_SILK  [SMT-JUMPER_3_2-NC_TRACE_SILK]  298.45,110.62 270 bottom
I2C9  JUMPER-SMT_3_2-NC_TRACE_SILK  [SMT-JUMPER_3_2-NC_TRACE_SILK]  373.38,110.62 270 bottom
J1  5.5x2.1mm Barrel  [POWER_JACK_SMD]  14.73,18.03 0 top
J2  USB-C  [USB-C-16P-4LAYER-ISOLATED]  19.05,48.77 270 top
J3  USB_SOLDER_PADS  [USB-SOLDER-PADS]  14.6,48.77 0 bottom
J4  [2X5_PTH_SILK_.05]  61.59,43.69 0 top
J5  M10NO_SILK  [1X10_NO_SILK]  31.5,64.01 0 top
J6  [1X10_SMD_COMBINED]  31.5,60.2 0 top
J7  [1X08_NO_SILK]  76.2,64.01 180 top
J8  [1X08_SMD_COMBINED]  76.2,60.2 180 top
J9  [1X08_NO_SILK]  40.64,8.13 0 top
J10  [1X08_SMD_COMBINED]  40.64,11.94 0 top
J11  [1X06_NO_SILK]  63.5,8.13 0 top
J12  [1X06_SMD_STRAIGHT_COMBO]  63.5,11.94 0 top
J13  QWIIC_RIGHT_ANGLE  [JST04_1MM_RA]  17.78,61.47 270 top
J14  [1X10_SMD_COMBINED]  106.43,60.2 0 top
J15  MICRO-SD-PUSH-PUSH-EXT-PIN  [MICROSD-EXTERNALPIN]  16.76,34.16 270 top
J16  [1X02_NO_SILK]  33.02,19.56 0 top
J17  [1X08_SMD_COMBINED]  115.57,11.94 0 top
J18  [1X08_SMD_COMBINED]  151.13,60.2 180 top
J19  [1X06_SMD_STRAIGHT_COMBO]  138.43,11.94 0 top
J20  USB-C  [USB-C-16P-4LAYER-ISOLATED]  93.98,48.77 270 top
J21  USB_SOLDER_PADS  [USB-SOLDER-PADS]  89.53,48.77 0 bottom
J22  M10NO_SILK  [1X10_NO_SILK]  106.43,64.01 0 top
J23  [1X08_NO_SILK]  115.57,8.13 0 top
J24  [1X06_NO_SILK]  138.43,8.13 0 top
J25  [1X08_NO_SILK]  151.13,64.01 180 top
J26  [2X5_PTH_SILK_.05]  136.53,43.69 0 top
J27  QWIIC_RIGHT_ANGLE  [JST04_1MM_RA]  92.71,61.47 270 top
J28  MICRO-SD-PUSH-PUSH-EXT-PIN  [MICROSD-EXTERNALPIN]  91.69,34.16 270 top
J29  5.5x2.1mm Barrel  [POWER_JACK_SMD]  89.66,18.03 0 top
J30  [1X02_NO_SILK]  107.95,19.56 0 top
J31  [1X10_SMD_COMBINED]  181.36,60.2 0 top
J32  [1X08_SMD_COMBINED]  190.5,11.94 0 top
J33  [1X08_SMD_COMBINED]  226.06,60.2 180 top
J34  [1X06_SMD_STRAIGHT_COMBO]  213.36,11.94 0 top
J35  USB-C  [USB-C-16P-4LAYER-ISOLATED]  168.91,48.77 270 top
J36  USB_SOLDER_PADS  [USB-SOLDER-PADS]  164.46,48.77 0 bottom
J37  M10NO_SILK  [1X10_NO_SILK]  181.36,64.01 0 top
J38  [1X08_NO_SILK]  190.5,8.13 0 top
J39  [1X06_NO_SILK]  213.36,8.13 0 top
J40  [1X08_NO_SILK]  226.06,64.01 180 top
J41  [2X5_PTH_SILK_.05]  211.45,43.69 0 top
J42  QWIIC_RIGHT_ANGLE  [JST04_1MM_RA]  167.64,61.47 270 top
J43  MICRO-SD-PUSH-PUSH-EXT-PIN  [MICROSD-EXTERNALPIN]  166.62,34.16 270 top
J44  5.5x2.1mm Barrel  [POWER_JACK_SMD]  164.59,18.03 0 top
J45  [1X02_NO_SILK]  182.88,19.56 0 top
J46  [1X10_SMD_COMBINED]  256.29,60.2 0 top
J47  [1X08_SMD_COMBINED]  265.43,11.94 0 top
J48  [1X08_SMD_COMBINED]  300.99,60.2 180 top
J49  [1X06_SMD_STRAIGHT_COMBO]  288.29,11.94 0 top
J50  USB-C  [USB-C-16P-4LAYER-ISOLATED]  243.84,48.77 270 top
J51  USB_SOLDER_PADS  [USB-SOLDER-PADS]  239.39,48.77 0 bottom
J52  M10NO_SILK  [1X10_NO_SILK]  256.29,64.01 0 top
J53  [1X08_NO_SILK]  265.43,8.13 0 top
J54  [1X06_NO_SILK]  288.29,8.13 0 top
J55  [1X08_NO_SILK]  300.99,64.01 180 top
J56  [2X5_PTH_SILK_.05]  286.38,43.69 0 top
J57  QWIIC_RIGHT_ANGLE  [JST04_1MM_RA]  242.57,61.47 270 top
J58  MICRO-SD-PUSH-PUSH-EXT-PIN  [MICROSD-EXTERNALPIN]  241.55,34.16 270 top
J59  5.5x2.1mm Barrel  [POWER_JACK_SMD]  239.52,18.03 0 top
J60  [1X02_NO_SILK]  257.81,19.56 0 top
J61  [1X10_SMD_COMBINED]  331.22,60.2 0 top
J62  [1X08_SMD_COMBINED]  340.36,11.94 0 top
J63  [1X08_SMD_COMBINED]  375.92,60.2 180 top
J64  [1X06_SMD_STRAIGHT_COMBO]  363.22,11.94 0 top
J65  USB-C  [USB-C-16P-4LAYER-ISOLATED]  318.77,48.77 270 top
J66  USB_SOLDER_PADS  [USB-SOLDER-PADS]  314.32,48.77 0 bottom
J67  M10NO_SILK  [1X10_NO_SILK]  331.22,64.01 0 top
J68  [1X08_NO_SILK]  340.36,8.13 0 top
J69  [1X06_NO_SILK]  363.22,8.13 0 top
J70  [1X08_NO_SILK]  375.92,64.01 180 top
J71  [2X5_PTH_SILK_.05]  361.31,43.69 0 top
J72  QWIIC_RIGHT_ANGLE  [JST04_1MM_RA]  317.5,61.47 270 top
J73  MICRO-SD-PUSH-PUSH-EXT-PIN  [MICROSD-EXTERNALPIN]  316.48,34.16 270 top
J74  5.5x2.1mm Barrel  [POWER_JACK_SMD]  314.45,18.03 0 top
J75  [1X02_NO_SILK]  332.74,19.56 0 top
J76  [1X10_SMD_COMBINED]  31.5,119.13 0 top
J77  [1X08_SMD_COMBINED]  40.64,70.87 0 top
J78  [1X08_SMD_COMBINED]  76.2,119.13 180 top
J79  [1X06_SMD_STRAIGHT_COMBO]  63.5,70.87 0 top
J80  USB-C  [USB-C-16P-4LAYER-ISOLATED]  19.05,107.7 270 top
J81  USB_SOLDER_PADS  [USB-SOLDER-PADS]  14.6,107.7 0 bottom
J82  M10NO_SILK  [1X10_NO_SILK]  31.5,122.94 0 top
J83  [1X08_NO_SILK]  40.64,67.06 0 top
J84  [1X06_NO_SILK]  63.5,67.06 0 top
J85  [1X08_NO_SILK]  76.2,122.94 180 top
J86  [2X5_PTH_SILK_.05]  61.59,102.62 0 top
J87  QWIIC_RIGHT_ANGLE  [JST04_1MM_RA]  17.78,120.4 270 top
J88  MICRO-SD-PUSH-PUSH-EXT-PIN  [MICROSD-EXTERNALPIN]  16.76,93.09 270 top
J89  5.5x2.1mm Barrel  [POWER_JACK_SMD]  14.73,76.96 0 top
J90  [1X02_NO_SILK]  33.02,78.49 0 top
J91  [1X10_SMD_COMBINED]  106.43,119.13 0 top
J92  [1X08_SMD_COMBINED]  115.57,70.87 0 top
J93  [1X08_SMD_COMBINED]  151.13,119.13 180 top
J94  [1X06_SMD_STRAIGHT_COMBO]  138.43,70.87 0 top
J95  USB-C  [USB-C-16P-4LAYER-ISOLATED]  93.98,107.7 270 top
J96  USB_SOLDER_PADS  [USB-SOLDER-PADS]  89.53,107.7 0 bottom
J97  M10NO_SILK  [1X10_NO_SILK]  106.43,122.94 0 top
J98  [1X08_NO_SILK]  115.57,67.06 0 top
J99  [1X06_NO_SILK]  138.43,67.06 0 top
J100  [1X08_NO_SILK]  151.13,122.94 180 top
J101  [2X5_PTH_SILK_.05]  136.53,102.62 0 top
J102  QWIIC_RIGHT_ANGLE  [JST04_1MM_RA]  92.71,120.4 270 top
J103  MICRO-SD-PUSH-PUSH-EXT-PIN  [MICROSD-EXTERNALPIN]  91.69,93.09 270 top
J104  5.5x2.1mm Barrel  [POWER_JACK_SMD]  89.66,76.96 0 top
J105  [1X02_NO_SILK]  107.95,78.49 0 top
J106  [1X10_SMD_COMBINED]  181.36,119.13 0 top
J107  [1X08_SMD_COMBINED]  190.5,70.87 0 top
J108  [1X08_SMD_COMBINED]  226.06,119.13 180 top
J109  [1X06_SMD_STRAIGHT_COMBO]  213.36,70.87 0 top
J110  USB-C  [USB-C-16P-4LAYER-ISOLATED]  168.91,107.7 270 top
J111  USB_SOLDER_PADS  [USB-SOLDER-PADS]  164.46,107.7 0 bottom
J112  M10NO_SILK  [1X10_NO_SILK]  181.36,122.94 0 top
J113  [1X08_NO_SILK]  190.5,67.06 0 top
J114  [1X06_NO_SILK]  213.36,67.06 0 top
J115  [1X08_NO_SILK]  226.06,122.94 180 top
J116  [2X5_PTH_SILK_.05]  211.45,102.62 0 top
J117  QWIIC_RIGHT_ANGLE  [JST04_1MM_RA]  167.64,120.4 270 top
J118  MICRO-SD-PUSH-PUSH-EXT-PIN  [MICROSD-EXTERNALPIN]  166.62,93.09 270 top
J119  5.5x2.1mm Barrel  [POWER_JACK_SMD]  164.59,76.96 0 top
J120  [1X02_NO_SILK]  182.88,78.49 0 top
J121  [1X10_SMD_COMBINED]  256.29,119.13 0 top
J122  [1X08_SMD_COMBINED]  265.43,70.87 0 top
J123  [1X08_SMD_COMBINED]  300.99,119.13 180 top
J124  [1X06_SMD_STRAIGHT_COMBO]  288.29,70.87 0 top
J125  USB-C  [USB-C-16P-4LAYER-ISOLATED]  243.84,107.7 270 top
J126  USB_SOLDER_PADS  [USB-SOLDER-PADS]  239.39,107.7 0 bottom
J127  M10NO_SILK  [1X10_NO_SILK]  256.29,122.94 0 top
J128  [1X08_NO_SILK]  265.43,67.06 0 top
J129  [1X06_NO_SILK]  288.29,67.06 0 top
J130  [1X08_NO_SILK]  300.99,122.94 180 top
J131  [2X5_PTH_SILK_.05]  286.38,102.62 0 top
J132  QWIIC_RIGHT_ANGLE  [JST04_1MM_RA]  242.57,120.4 270 top
J133  MICRO-SD-PUSH-PUSH-EXT-PIN  [MICROSD-EXTERNALPIN]  241.55,93.09 270 top
J134  5.5x2.1mm Barrel  [POWER_JACK_SMD]  239.52,76.96 0 top
J135  [1X02_NO_SILK]  257.81,78.49 0 top
J136  [1X10_SMD_COMBINED]  331.22,119.13 0 top
J137  [1X08_SMD_COMBINED]  340.36,70.87 0 top
J138  [1X08_SMD_COMBINED]  375.92,119.13 180 top
J139  [1X06_SMD_STRAIGHT_COMBO]  363.22,70.87 0 top
J140  USB-C  [USB-C-16P-4LAYER-ISOLATED]  318.77,107.7 270 top
J141  USB_SOLDER_PADS  [USB-SOLDER-PADS]  314.32,107.7 0 bottom
J142  M10NO_SILK  [1X10_NO_SILK]  331.22,122.94 0 top
J143  [1X08_NO_SILK]  340.36,67.06 0 top
J144  [1X06_NO_SILK]  363.22,67.06 0 top
J145  [1X08_NO_SILK]  375.92,122.94 180 top
J146  [2X5_PTH_SILK_.05]  361.31,102.62 0 top
J147  QWIIC_RIGHT_ANGLE  [JST04_1MM_RA]  317.5,120.4 270 top
J148  MICRO-SD-PUSH-PUSH-EXT-PIN  [MICROSD-EXTERNALPIN]  316.48,93.09 270 top
J149  5.5x2.1mm Barrel  [POWER_JACK_SMD]  314.45,76.96 0 top
J150  [1X02_NO_SILK]  332.74,78.49 0 top
JP1  FIDUCIAL1X2  [FIDUCIAL-1X2]  78.74,13.21 0 top
JP2  LiPo  [JST-2-SMD]  34.29,10.67 180 top
JP3  STAND-OFF  [STAND-OFF]  26.67,11.94 0 top
JP4  STAND-OFF  [STAND-OFF]  78.74,17.02 0 top
JP5  STAND-OFF  [STAND-OFF]  78.74,44.96 0 top
JP6  STAND-OFF  [STAND-OFF]  27.94,60.2 0 top
JP7  FIDUCIAL1X2  [FIDUCIAL-1X2]  21.59,64.26 0 bottom
JP8  FIDUCIAL1X2  [FIDUCIAL-1X2]  78.74,13.21 0 bottom
JP9  FIDUCIAL1X2  [FIDUCIAL-1X2]  21.59,64.26 0 top
JP10  LED_DO  [SMT-JUMPER_2_NO_SILK]  52.7,16.38 270 bottom
JP11  STAND-OFF  [STAND-OFF]  101.6,11.94 0 top
JP12  STAND-OFF  [STAND-OFF]  153.67,17.02 0 top
JP13  STAND-OFF  [STAND-OFF]  153.67,44.96 0 top
JP14  STAND-OFF  [STAND-OFF]  102.87,60.2 0 top
JP15  FIDUCIAL1X2  [FIDUCIAL-1X2]  96.52,64.26 0 bottom
JP16  FIDUCIAL1X2  [FIDUCIAL-1X2]  153.67,13.21 0 top
JP17  FIDUCIAL1X2  [FIDUCIAL-1X2]  153.67,13.21 0 bottom
JP18  FIDUCIAL1X2  [FIDUCIAL-1X2]  96.52,64.26 0 top
JP19  LiPo  [JST-2-SMD]  109.22,10.67 180 top
JP20  LED_DO  [SMT-JUMPER_2_NO_SILK]  127.64,16.38 270 bottom
JP21  STAND-OFF  [STAND-OFF]  176.53,11.94 0 top
JP22  STAND-OFF  [STAND-OFF]  228.6,17.02 0 top
JP23  STAND-OFF  [STAND-OFF]  228.6,44.96 0 top
JP24  STAND-OFF  [STAND-OFF]  177.8,60.2 0 top
JP25  FIDUCIAL1X2  [FIDUCIAL-1X2]  171.45,64.26 0 bottom
JP26  FIDUCIAL1X2  [FIDUCIAL-1X2]  228.6,13.21 0 top
JP27  FIDUCIAL1X2  [FIDUCIAL-1X2]  228.6,13.21 0 bottom
JP28  FIDUCIAL1X2  [FIDUCIAL-1X2]  171.45,64.26 0 top
JP29  LiPo  [JST-2-SMD]  184.15,10.67 180 top
JP30  LED_DO  [SMT-JUMPER_2_NO_SILK]  202.56,16.38 270 bottom
JP31  STAND-OFF  [STAND-OFF]  251.46,11.94 0 top
JP32  STAND-OFF  [STAND-OFF]  303.53,17.02 0 top
JP33  STAND-OFF  [STAND-OFF]  303.53,44.96 0 top
JP34  STAND-OFF  [STAND-OFF]  252.73,60.2 0 top
JP35  FIDUCIAL1X2  [FIDUCIAL-1X2]  246.38,64.26 0 bottom
JP36  FIDUCIAL1X2  [FIDUCIAL-1X2]  303.53,13.21 0 top
JP37  FIDUCIAL1X2  [FIDUCIAL-1X2]  303.53,13.21 0 bottom
JP38  FIDUCIAL1X2  [FIDUCIAL-1X2]  246.38,64.26 0 top
JP39  LiPo  [JST-2-SMD]  259.08,10.67 180 top
JP40  LED_DO  [SMT-JUMPER_2_NO_SILK]  277.5,16.38 270 bottom
JP41  STAND-OFF  [STAND-OFF]  326.39,11.94 0 top
JP42  STAND-OFF  [STAND-OFF]  378.46,17.02 0 top
JP43  STAND-OFF  [STAND-OFF]  378.46,44.96 0 top
JP44  STAND-OFF  [STAND-OFF]  327.66,60.2 0 top
JP45  FIDUCIAL1X2  [FIDUCIAL-1X2]  321.31,64.26 0 bottom
JP46  FIDUCIAL1X2  [FIDUCIAL-1X2]  378.46,13.21 0 top
JP47  FIDUCIAL1X2  [FIDUCIAL-1X2]  378.46,13.21 0 bottom
JP48  FIDUCIAL1X2  [FIDUCIAL-1X2]  321.31,64.26 0 top
JP49  LiPo  [JST-2-SMD]  334.01,10.67 180 top
JP50  LED_DO  [SMT-JUMPER_2_NO_SILK]  352.43,16.38 270 bottom
JP51  STAND-OFF  [STAND-OFF]  26.67,70.87 0 top
JP52  STAND-OFF  [STAND-OFF]  78.74,75.95 0 top
JP53  STAND-OFF  [STAND-OFF]  78.74,103.89 0 top
JP54  STAND-OFF  [STAND-OFF]  27.94,119.13 0 top
JP55  FIDUCIAL1X2  [FIDUCIAL-1X2]  21.59,123.19 0 bottom
JP56  FIDUCIAL1X2  [FIDUCIAL-1X2]  78.74,72.14 0 top
JP57  FIDUCIAL1X2  [FIDUCIAL-1X2]  78.74,72.14 0 bottom
JP58  FIDUCIAL1X2  [FIDUCIAL-1X2]  21.59,123.19 0 top
JP59  LiPo  [JST-2-SMD]  34.29,69.6 180 top
JP60  LED_DO  [SMT-JUMPER_2_NO_SILK]  52.7,75.31 270 bottom
JP61  STAND-OFF  [STAND-OFF]  101.6,70.87 0 top
JP62  STAND-OFF  [STAND-OFF]  153.67,75.95 0 top
JP63  STAND-OFF  [STAND-OFF]  153.67,103.89 0 top
JP64  STAND-OFF  [STAND-OFF]  102.87,119.13 0 top
JP65  FIDUCIAL1X2  [FIDUCIAL-1X2]  96.52,123.19 0 bottom
JP66  FIDUCIAL1X2  [FIDUCIAL-1X2]  153.67,72.14 0 top
JP67  FIDUCIAL1X2  [FIDUCIAL-1X2]  153.67,72.14 0 bottom
JP68  FIDUCIAL1X2  [FIDUCIAL-1X2]  96.52,123.19 0 top
JP69  LiPo  [JST-2-SMD]  109.22,69.6 180 top
JP70  LED_DO  [SMT-JUMPER_2_NO_SILK]  127.64,75.31 270 bottom
JP71  STAND-OFF  [STAND-OFF]  176.53,70.87 0 top
JP72  STAND-OFF  [STAND-OFF]  228.6,75.95 0 top
JP73  STAND-OFF  [STAND-OFF]  228.6,103.89 0 top
JP74  STAND-OFF  [STAND-OFF]  177.8,119.13 0 top
JP75  FIDUCIAL1X2  [FIDUCIAL-1X2]  171.45,123.19 0 bottom
JP76  FIDUCIAL1X2  [FIDUCIAL-1X2]  228.6,72.14 0 top
JP77  FIDUCIAL1X2  [FIDUCIAL-1X2]  228.6,72.14 0 bottom
JP78  FIDUCIAL1X2  [FIDUCIAL-1X2]  171.45,123.19 0 top
JP79  LiPo  [JST-2-SMD]  184.15,69.6 180 top
JP80  LED_DO  [SMT-JUMPER_2_NO_SILK]  202.56,75.31 270 bottom
JP81  STAND-OFF  [STAND-OFF]  251.46,70.87 0 top
JP82  STAND-OFF  [STAND-OFF]  303.53,75.95 0 top
JP83  STAND-OFF  [STAND-OFF]  303.53,103.89 0 top
JP84  STAND-OFF  [STAND-OFF]  252.73,119.13 0 top
JP85  FIDUCIAL1X2  [FIDUCIAL-1X2]  246.38,123.19 0 bottom
JP86  FIDUCIAL1X2  [FIDUCIAL-1X2]  303.53,72.14 0 top
JP87  FIDUCIAL1X2  [FIDUCIAL-1X2]  303.53,72.14 0 bottom
JP88  FIDUCIAL1X2  [FIDUCIAL-1X2]  246.38,123.19 0 top
JP89  LiPo  [JST-2-SMD]  259.08,69.6 180 top
JP90  LED_DO  [SMT-JUMPER_2_NO_SILK]  277.5,75.31 270 bottom
JP91  STAND-OFF  [STAND-OFF]  326.39,70.87 0 top
JP92  STAND-OFF  [STAND-OFF]  378.46,75.95 0 top
JP93  STAND-OFF  [STAND-OFF]  378.46,103.89 0 top
JP94  STAND-OFF  [STAND-OFF]  327.66,119.13 0 top
JP95  FIDUCIAL1X2  [FIDUCIAL-1X2]  321.31,123.19 0 bottom
JP96  FIDUCIAL1X2  [FIDUCIAL-1X2]  378.46,72.14 0 top
JP97  FIDUCIAL1X2  [FIDUCIAL-1X2]  378.46,72.14 0 bottom
JP98  FIDUCIAL1X2  [FIDUCIAL-1X2]  321.31,123.19 0 top
JP99  LiPo  [JST-2-SMD]  334.01,69.6 180 top
JP100  LED_DO  [SMT-JUMPER_2_NO_SILK]  352.43,75.31 270 bottom
LED_1  JUMPER-SMT_2_NC_TRACE_SILK  [SMT-JUMPER_2_NC_TRACE_SILK]  110.49,51.94 180 bottom
LED_2  JUMPER-SMT_2_NC_TRACE_SILK  [SMT-JUMPER_2_NC_TRACE_SILK]  185.42,51.94 180 bottom
LED_3  JUMPER-SMT_2_NC_TRACE_SILK  [SMT-JUMPER_2_NC_TRACE_SILK]  260.35,51.94 180 bottom
LED_4  JUMPER-SMT_2_NC_TRACE_SILK  [SMT-JUMPER_2_NC_TRACE_SILK]  335.28,51.94 180 bottom
LED_5  JUMPER-SMT_2_NC_TRACE_SILK  [SMT-JUMPER_2_NC_TRACE_SILK]  35.56,110.87 180 bottom
LED_6  JUMPER-SMT_2_NC_TRACE_SILK  [SMT-JUMPER_2_NC_TRACE_SILK]  110.49,110.87 180 bottom
LED_7  JUMPER-SMT_2_NC_TRACE_SILK  [SMT-JUMPER_2_NC_TRACE_SILK]  185.42,110.87 180 bottom
LED_8  JUMPER-SMT_2_NC_TRACE_SILK  [SMT-JUMPER_2_NC_TRACE_SILK]  260.35,110.87 180 bottom
LED_9  JUMPER-SMT_2_NC_TRACE_SILK  [SMT-JUMPER_2_NC_TRACE_SILK]  335.28,110.87 180 bottom
LED_18  JUMPER-SMT_2_NC_TRACE_SILK  [SMT-JUMPER_2_NC_TRACE_SILK]  35.56,51.94 180 bottom
LED_CHG  JUMPER-SMT_2_NC_TRACE_SILK  [SMT-JUMPER_2_NC_TRACE_SILK]  35.56,41.78 0 bottom
LED_CHG1  JUMPER-SMT_2_NC_TRACE_SILK  [SMT-JUMPER_2_NC_TRACE_SILK]  110.49,41.78 0 bottom
LED_CHG2  JUMPER-SMT_2_NC_TRACE_SILK  [SMT-JUMPER_2_NC_TRACE_SILK]  185.42,41.78 0 bottom
LED_CHG3  JUMPER-SMT_2_NC_TRACE_SILK  [SMT-JUMPER_2_NC_TRACE_SILK]  260.35,41.78 0 bottom
LED_CHG4  JUMPER-SMT_2_NC_TRACE_SILK  [SMT-JUMPER_2_NC_TRACE_SILK]  335.28,41.78 0 bottom
LED_CHG5  JUMPER-SMT_2_NC_TRACE_SILK  [SMT-JUMPER_2_NC_TRACE_SILK]  35.56,100.71 0 bottom
LED_CHG6  JUMPER-SMT_2_NC_TRACE_SILK  [SMT-JUMPER_2_NC_TRACE_SILK]  110.49,100.71 0 bottom
LED_CHG7  JUMPER-SMT_2_NC_TRACE_SILK  [SMT-JUMPER_2_NC_TRACE_SILK]  185.42,100.71 0 bottom
LED_CHG8  JUMPER-SMT_2_NC_TRACE_SILK  [SMT-JUMPER_2_NC_TRACE_SILK]  260.35,100.71 0 bottom
LED_CHG9  JUMPER-SMT_2_NC_TRACE_SILK  [SMT-JUMPER_2_NC_TRACE_SILK]  335.28,100.71 0 bottom
LED_PWR  JUMPER-SMT_2_NC_TRACE_SILK  [SMT-JUMPER_2_NC_TRACE_SILK]  35.56,44.32 180 bottom
LED_PWR1  JUMPER-SMT_2_NC_TRACE_SILK  [SMT-JUMPER_2_NC_TRACE_SILK]  110.49,44.32 180 bottom
LED_PWR2  JUMPER-SMT_2_NC_TRACE_SILK  [SMT-JUMPER_2_NC_TRACE_SILK]  185.42,44.32 180 bottom
LED_PWR3  JUMPER-SMT_2_NC_TRACE_SILK  [SMT-JUMPER_2_NC_TRACE_SILK]  260.35,44.32 180 bottom
LED_PWR4  JUMPER-SMT_2_NC_TRACE_SILK  [SMT-JUMPER_2_NC_TRACE_SILK]  335.28,44.32 180 bottom
LED_PWR5  JUMPER-SMT_2_NC_TRACE_SILK  [SMT-JUMPER_2_NC_TRACE_SILK]  35.56,103.25 180 bottom
LED_PWR6  JUMPER-SMT_2_NC_TRACE_SILK  [SMT-JUMPER_2_NC_TRACE_SILK]  110.49,103.25 180 bottom
LED_PWR7  JUMPER-SMT_2_NC_TRACE_SILK  [SMT-JUMPER_2_NC_TRACE_SILK]  185.42,103.25 180 bottom
LED_PWR8  JUMPER-SMT_2_NC_TRACE_SILK  [SMT-JUMPER_2_NC_TRACE_SILK]  260.35,103.25 180 bottom
LED_PWR9  JUMPER-SMT_2_NC_TRACE_SILK  [SMT-JUMPER_2_NC_TRACE_SILK]  335.28,103.25 180 bottom
LED_RX  JUMPER-SMT_2_NC_TRACE_SILK  [SMT-JUMPER_2_NC_TRACE_SILK]  35.56,46.86 180 bottom
LED_RX1  JUMPER-SMT_2_NC_TRACE_SILK  [SMT-JUMPER_2_NC_TRACE_SILK]  110.49,46.86 180 bottom
LED_RX2  JUMPER-SMT_2_NC_TRACE_SILK  [SMT-JUMPER_2_NC_TRACE_SILK]  185.42,46.86 180 bottom
LED_RX3  JUMPER-SMT_2_NC_TRACE_SILK  [SMT-JUMPER_2_NC_TRACE_SILK]  260.35,46.86 180 bottom
LED_RX4  JUMPER-SMT_2_NC_TRACE_SILK  [SMT-JUMPER_2_NC_TRACE_SILK]  335.28,46.86 180 bottom
LED_RX5  JUMPER-SMT_2_NC_TRACE_SILK  [SMT-JUMPER_2_NC_TRACE_SILK]  35.56,105.79 180 bottom
LED_RX6  JUMPER-SMT_2_NC_TRACE_SILK  [SMT-JUMPER_2_NC_TRACE_SILK]  110.49,105.79 180 bottom
LED_RX7  JUMPER-SMT_2_NC_TRACE_SILK  [SMT-JUMPER_2_NC_TRACE_SILK]  185.42,105.79 180 bottom
LED_RX8  JUMPER-SMT_2_NC_TRACE_SILK  [SMT-JUMPER_2_NC_TRACE_SILK]  260.35,105.79 180 bottom
LED_RX9  JUMPER-SMT_2_NC_TRACE_SILK  [SMT-JUMPER_2_NC_TRACE_SILK]  335.28,105.79 180 bottom
LED_TX  JUMPER-SMT_2_NC_TRACE_SILK  [SMT-JUMPER_2_NC_TRACE_SILK]  35.56,49.4 180 bottom
LED_TX1  JUMPER-SMT_2_NC_TRACE_SILK  [SMT-JUMPER_2_NC_TRACE_SILK]  110.49,49.4 180 bottom
LED_TX2  JUMPER-SMT_2_NC_TRACE_SILK  [SMT-JUMPER_2_NC_TRACE_SILK]  185.42,49.4 180 bottom
LED_TX3  JUMPER-SMT_2_NC_TRACE_SILK  [SMT-JUMPER_2_NC_TRACE_SILK]  260.35,49.4 180 bottom
LED_TX4  JUMPER-SMT_2_NC_TRACE_SILK  [SMT-JUMPER_2_NC_TRACE_SILK]  335.28,49.4 180 bottom
LED_TX5  JUMPER-SMT_2_NC_TRACE_SILK  [SMT-JUMPER_2_NC_TRACE_SILK]  35.56,108.33 180 bottom
LED_TX6  JUMPER-SMT_2_NC_TRACE_SILK  [SMT-JUMPER_2_NC_TRACE_SILK]  110.49,108.33 180 bottom
LED_TX7  JUMPER-SMT_2_NC_TRACE_SILK  [SMT-JUMPER_2_NC_TRACE_SILK]  185.42,108.33 180 bottom
LED_TX8  JUMPER-SMT_2_NC_TRACE_SILK  [SMT-JUMPER_2_NC_TRACE_SILK]  260.35,108.33 180 bottom
LED_TX9  JUMPER-SMT_2_NC_TRACE_SILK  [SMT-JUMPER_2_NC_TRACE_SILK]  335.28,108.33 180 bottom
LOGO1  SFE_LOGO_NAME.1_INCH  [SFE_LOGO_NAME_.1]  62.36,19.56 0 top
LOGO2  QWIIC_LOGO_5MM  [QWIIC_5MM]  15.88,57.02 0 top
LOGO3  OSHW-LOGOMINI  [OSHW-LOGO-MINI]  14.99,11.94 0 bottom
LOGO4  SFE_LOGO_NAME.1_INCH  [SFE_LOGO_NAME_.1]  137.29,19.56 0 top
LOGO5  QWIIC_LOGO_5MM  [QWIIC_5MM]  90.81,57.02 0 top
LOGO6  SFE_LOGO_NAME_FLAME.2_INCH  [SFE_LOGO_NAME_FLAME_.2]  48.26,41.15 0 bottom
LOGO7  OSHW-LOGOMINI  [OSHW-LOGO-MINI]  89.92,11.94 0 bottom
LOGO8  SFE_LOGO_NAME_FLAME.2_INCH  [SFE_LOGO_NAME_FLAME_.2]  123.19,41.15 0 bottom
LOGO9  SFE_LOGO_NAME.1_INCH  [SFE_LOGO_NAME_.1]  212.22,19.56 0 top
LOGO10  QWIIC_LOGO_5MM  [QWIIC_5MM]  165.73,57.02 0 top
LOGO11  OSHW-LOGOMINI  [OSHW-LOGO-MINI]  164.85,11.94 0 bottom
LOGO12  SFE_LOGO_NAME_FLAME.2_INCH  [SFE_LOGO_NAME_FLAME_.2]  198.12,41.15 0 bottom
LOGO13  SFE_LOGO_NAME.1_INCH  [SFE_LOGO_NAME_.1]  287.15,19.56 0 top
LOGO14  QWIIC_LOGO_5MM  [QWIIC_5MM]  240.66,57.02 0 top
LOGO15  OSHW-LOGOMINI  [OSHW-LOGO-MINI]  239.78,11.94 0 bottom
LOGO16  SFE_LOGO_NAME_FLAME.2_INCH  [SFE_LOGO_NAME_FLAME_.2]  273.05,41.15 0 bottom
LOGO17  SFE_LOGO_NAME.1_INCH  [SFE_LOGO_NAME_.1]  362.08,19.56 0 top
LOGO18  QWIIC_LOGO_5MM  [QWIIC_5MM]  315.59,57.02 0 top
LOGO19  OSHW-LOGOMINI  [OSHW-LOGO-MINI]  314.71,11.94 0 bottom
LOGO20  SFE_LOGO_NAME_FLAME.2_INCH  [SFE_LOGO_NAME_FLAME_.2]  347.98,41.15 0 bottom
LOGO21  SFE_LOGO_NAME.1_INCH  [SFE_LOGO_NAME_.1]  62.36,78.49 0 top
LOGO22  QWIIC_LOGO_5MM  [QWIIC_5MM]  15.88,115.95 0 top
LOGO23  OSHW-LOGOMINI  [OSHW-LOGO-MINI]  14.99,70.87 0 bottom
LOGO24  SFE_LOGO_NAME_FLAME.2_INCH  [SFE_LOGO_NAME_FLAME_.2]  48.26,100.08 0 bottom
LOGO25  SFE_LOGO_NAME.1_INCH  [SFE_LOGO_NAME_.1]  137.29,78.49 0 top
LOGO26  QWIIC_LOGO_5MM  [QWIIC_5MM]  90.81,115.95 0 top
LOGO27  OSHW-LOGOMINI  [OSHW-LOGO-MINI]  89.92,70.87 0 bottom
LOGO28  SFE_LOGO_NAME_FLAME.2_INCH  [SFE_LOGO_NAME_FLAME_.2]  123.19,100.08 0 bottom
LOGO29  SFE_LOGO_NAME.1_INCH  [SFE_LOGO_NAME_.1]  212.22,78.49 0 top
LOGO30  QWIIC_LOGO_5MM  [QWIIC_5MM]  165.73,115.95 0 top
LOGO31  OSHW-LOGOMINI  [OSHW-LOGO-MINI]  164.85,70.87 0 bottom
LOGO32  SFE_LOGO_NAME_FLAME.2_INCH  [SFE_LOGO_NAME_FLAME_.2]  198.12,100.08 0 bottom
LOGO33  SFE_LOGO_NAME.1_INCH  [SFE_LOGO_NAME_.1]  287.15,78.49 0 top
LOGO34  QWIIC_LOGO_5MM  [QWIIC_5MM]  240.66,115.95 0 top
LOGO35  OSHW-LOGOMINI  [OSHW-LOGO-MINI]  239.78,70.87 0 bottom
LOGO36  SFE_LOGO_NAME_FLAME.2_INCH  [SFE_LOGO_NAME_FLAME_.2]  273.05,100.08 0 bottom
LOGO37  SFE_LOGO_NAME.1_INCH  [SFE_LOGO_NAME_.1]  362.08,78.49 0 top
LOGO38  QWIIC_LOGO_5MM  [QWIIC_5MM]  315.59,115.95 0 top
LOGO39  OSHW-LOGOMINI  [OSHW-LOGO-MINI]  314.71,70.87 0 bottom
LOGO40  SFE_LOGO_NAME_FLAME.2_INCH  [SFE_LOGO_NAME_FLAME_.2]  347.98,100.08 0 bottom
MEAS  JUMPER-COMBO_2_NC_TRACE  [COMBO-JUMPER_2_NC_TRACE]  52.7,50.67 180 bottom
MEAS1  JUMPER-COMBO_2_NC_TRACE  [COMBO-JUMPER_2_NC_TRACE]  127.64,50.67 180 bottom
MEAS2  JUMPER-COMBO_2_NC_TRACE  [COMBO-JUMPER_2_NC_TRACE]  202.56,50.67 180 bottom
MEAS3  JUMPER-COMBO_2_NC_TRACE  [COMBO-JUMPER_2_NC_TRACE]  277.5,50.67 180 bottom
MEAS4  JUMPER-COMBO_2_NC_TRACE  [COMBO-JUMPER_2_NC_TRACE]  352.43,50.67 180 bottom
MEAS5  JUMPER-COMBO_2_NC_TRACE  [COMBO-JUMPER_2_NC_TRACE]  52.7,109.6 180 bottom
MEAS6  JUMPER-COMBO_2_NC_TRACE  [COMBO-JUMPER_2_NC_TRACE]  127.64,109.6 180 bottom
MEAS7  JUMPER-COMBO_2_NC_TRACE  [COMBO-JUMPER_2_NC_TRACE]  202.56,109.6 180 bottom
MEAS8  JUMPER-COMBO_2_NC_TRACE  [COMBO-JUMPER_2_NC_TRACE]  277.5,109.6 180 bottom
MEAS9  JUMPER-COMBO_2_NC_TRACE  [COMBO-JUMPER_2_NC_TRACE]  352.43,109.6 180 bottom
Q1  MBT3904DW1T1  [SC70-6]  54.61,44.96 180 top
Q2  [SC70-6]  45.72,34.8 270 top
Q3  20V/4.2A/52mΩ/1.4W  [SOT23-3]  41.91,34.8 90 top
Q4  [SOT363_PHILIPS]  45.72,38.61 270 top
Q5  20V/4.2A/52mΩ/1.4W  [SOT23-3]  41.91,38.61 90 top
Q6  [SOT363_PHILIPS]  45.72,19.56 270 top
Q7  20V/4.2A/52mΩ/1.4W  [SOT23-3]  41.91,27.18 90 top
Q8  [SOT363_PHILIPS]  45.72,30.99 270 top
Q9  20V/4.2A/52mΩ/1.4W  [SOT23-3]  41.91,30.99 90 top
Q10  [SOT363_PHILIPS]  45.72,27.18 270 top
Q11  20V/4.2A/52mΩ/1.4W  [SOT23-3]  41.91,23.37 270 top
Q12  [SOT363_PHILIPS]  45.72,23.37 270 top
Q13  20V/4.2A/52mΩ/1.4W  [SOT23-3]  41.91,19.56 270 top
Q14  MBT3904DW1T1  [SC70-6]  129.54,44.96 180 top
Q15  [SOT363_PHILIPS]  120.65,38.61 270 top
Q16  20V/4.2A/52mΩ/1.4W  [SOT23-3]  116.84,38.61 90 top
Q17  [SC70-6]  120.65,34.8 270 top
Q18  20V/4.2A/52mΩ/1.4W  [SOT23-3]  116.84,34.8 90 top
Q19  [SOT363_PHILIPS]  120.65,19.56 270 top
Q20  20V/4.2A/52mΩ/1.4W  [SOT23-3]  116.84,27.18 90 top
Q21  [SOT363_PHILIPS]  120.65,30.99 270 top
Q22  20V/4.2A/52mΩ/1.4W  [SOT23-3]  116.84,30.99 90 top
Q23  [SOT363_PHILIPS]  120.65,27.18 270 top
Q24  20V/4.2A/52mΩ/1.4W  [SOT23-3]  116.84,23.37 270 top
Q25  [SOT363_PHILIPS]  120.65,23.37 270 top
Q26  20V/4.2A/52mΩ/1.4W  [SOT23-3]  116.84,19.56 270 top
Q27  MBT3904DW1T1  [SC70-6]  204.47,44.96 180 top
Q28  [SOT363_PHILIPS]  195.58,38.61 270 top
Q29  20V/4.2A/52mΩ/1.4W  [SOT23-3]  191.77,38.61 90 top
Q30  [SC70-6]  195.58,34.8 270 top
Q31  20V/4.2A/52mΩ/1.4W  [SOT23-3]  191.77,34.8 90 top
Q32  [SOT363_PHILIPS]  195.58,19.56 270 top
Q33  20V/4.2A/52mΩ/1.4W  [SOT23-3]  191.77,27.18 90 top
Q34  [SOT363_PHILIPS]  195.58,30.99 270 top
Q35  20V/4.2A/52mΩ/1.4W  [SOT23-3]  191.77,30.99 90 top
Q36  [SOT363_PHILIPS]  195.58,27.18 270 top
Q37  20V/4.2A/52mΩ/1.4W  [SOT23-3]  191.77,23.37 270 top
Q38  [SOT363_PHILIPS]  195.58,23.37 270 top
Q39  20V/4.2A/52mΩ/1.4W  [SOT23-3]  191.77,19.56 270 top
Q40  MBT3904DW1T1  [SC70-6]  279.4,44.96 180 top
Q41  [SOT363_PHILIPS]  270.51,38.61 270 top
Q42  20V/4.2A/52mΩ/1.4W  [SOT23-3]  266.7,38.61 90 top
Q43  [SC70-6]  270.51,34.8 270 top
Q44  20V/4.2A/52mΩ/1.4W  [SOT23-3]  266.7,34.8 90 top
Q45  [SOT363_PHILIPS]  270.51,19.56 270 top
Q46  20V/4.2A/52mΩ/1.4W  [SOT23-3]  266.7,27.18 90 top
Q47  [SOT363_PHILIPS]  270.51,30.99 270 top
Q48  20V/4.2A/52mΩ/1.4W  [SOT23-3]  266.7,30.99 90 top
Q49  [SOT363_PHILIPS]  270.51,27.18 270 top
Q50  20V/4.2A/52mΩ/1.4W  [SOT23-3]  266.7,23.37 270 top
Q51  [SOT363_PHILIPS]  270.51,23.37 270 top
Q52  20V/4.2A/52mΩ/1.4W  [SOT23-3]  266.7,19.56 270 top
Q53  MBT3904DW1T1  [SC70-6]  354.33,44.96 180 top
Q54  [SOT363_PHILIPS]  345.44,38.61 270 top
Q55  20V/4.2A/52mΩ/1.4W  [SOT23-3]  341.63,38.61 90 top
Q56  [SC70-6]  345.44,34.8 270 top
Q57  20V/4.2A/52mΩ/1.4W  [SOT23-3]  341.63,34.8 90 top
Q58  [SOT363_PHILIPS]  345.44,19.56 270 top
Q59  20V/4.2A/52mΩ/1.4W  [SOT23-3]  341.63,27.18 90 top
Q60  [SOT363_PHILIPS]  345.44,30.99 270 top
Q61  20V/4.2A/52mΩ/1.4W  [SOT23-3]  341.63,30.99 90 top
Q62  [SOT363_PHILIPS]  345.44,27.18 270 top
Q63  20V/4.2A/52mΩ/1.4W  [SOT23-3]  341.63,23.37 270 top
Q64  [SOT363_PHILIPS]  345.44,23.37 270 top
Q65  20V/4.2A/52mΩ/1.4W  [SOT23-3]  341.63,19.56 270 top
Q66  MBT3904DW1T1  [SC70-6]  54.61,103.89 180 top
Q67  [SOT363_PHILIPS]  45.72,97.54 270 top
Q68  20V/4.2A/52mΩ/1.4W  [SOT23-3]  41.91,97.54 90 top
Q69  [SC70-6]  45.72,93.73 270 top
Q70  20V/4.2A/52mΩ/1.4W  [SOT23-3]  41.91,93.73 90 top
Q71  [SOT363_PHILIPS]  45.72,78.49 270 top
Q72  20V/4.2A/52mΩ/1.4W  [SOT23-3]  41.91,86.11 90 top
Q73  [SOT363_PHILIPS]  45.72,89.92 270 top
Q74  20V/4.2A/52mΩ/1.4W  [SOT23-3]  41.91,89.92 90 top
Q75  [SOT363_PHILIPS]  45.72,86.11 270 top
Q76  20V/4.2A/52mΩ/1.4W  [SOT23-3]  41.91,82.3 270 top
Q77  [SOT363_PHILIPS]  45.72,82.3 270 top
Q78  20V/4.2A/52mΩ/1.4W  [SOT23-3]  41.91,78.49 270 top
Q79  MBT3904DW1T1  [SC70-6]  129.54,103.89 180 top
Q80  [SOT363_PHILIPS]  120.65,97.54 270 top
Q81  20V/4.2A/52mΩ/1.4W  [SOT23-3]  116.84,97.54 90 top
Q82  [SC70-6]  120.65,93.73 270 top
Q83  20V/4.2A/52mΩ/1.4W  [SOT23-3]  116.84,93.73 90 top
Q84  [SOT363_PHILIPS]  120.65,78.49 270 top
Q85  20V/4.2A/52mΩ/1.4W  [SOT23-3]  116.84,86.11 90 top
Q86  [SOT363_PHILIPS]  120.65,89.92 270 top
Q87  20V/4.2A/52mΩ/1.4W  [SOT23-3]  116.84,89.92 90 top
Q88  [SOT363_PHILIPS]  120.65,86.11 270 top
Q89  20V/4.2A/52mΩ/1.4W  [SOT23-3]  116.84,82.3 270 top
Q90  [SOT363_PHILIPS]  120.65,82.3 270 top
Q91  20V/4.2A/52mΩ/1.4W  [SOT23-3]  116.84,78.49 270 top
Q92  MBT3904DW1T1  [SC70-6]  204.47,103.89 180 top
Q93  [SOT363_PHILIPS]  195.58,97.54 270 top
Q94  20V/4.2A/52mΩ/1.4W  [SOT23-3]  191.77,97.54 90 top
Q95  [SC70-6]  195.58,93.73 270 top
Q96  20V/4.2A/52mΩ/1.4W  [SOT23-3]  191.77,93.73 90 top
Q97  [SOT363_PHILIPS]  195.58,78.49 270 top
Q98  20V/4.2A/52mΩ/1.4W  [SOT23-3]  191.77,86.11 90 top
Q99  [SOT363_PHILIPS]  195.58,89.92 270 top
Q100  20V/4.2A/52mΩ/1.4W  [SOT23-3]  191.77,89.92 90 top
Q101  [SOT363_PHILIPS]  195.58,86.11 270 top
Q102  20V/4.2A/52mΩ/1.4W  [SOT23-3]  191.77,82.3 270 top
Q103  [SOT363_PHILIPS]  195.58,82.3 270 top
Q104  20V/4.2A/52mΩ/1.4W  [SOT23-3]  191.77,78.49 270 top
Q105  MBT3904DW1T1  [SC70-6]  279.4,103.89 180 top
Q106  [SOT363_PHILIPS]  270.51,97.54 270 top
Q107  20V/4.2A/52mΩ/1.4W  [SOT23-3]  266.7,97.54 90 top
Q108  [SC70-6]  270.51,93.73 270 top
Q109  20V/4.2A/52mΩ/1.4W  [SOT23-3]  266.7,93.73 90 top
Q110  [SOT363_PHILIPS]  270.51,78.49 270 top
Q111  20V/4.2A/52mΩ/1.4W  [SOT23-3]  266.7,86.11 90 top
Q112  [SOT363_PHILIPS]  270.51,89.92 270 top
Q113  20V/4.2A/52mΩ/1.4W  [SOT23-3]  266.7,89.92 90 top
Q114  [SOT363_PHILIPS]  270.51,86.11 270 top
Q115  20V/4.2A/52mΩ/1.4W  [SOT23-3]  266.7,82.3 270 top
Q116  [SOT363_PHILIPS]  270.51,82.3 270 top
Q117  20V/4.2A/52mΩ/1.4W  [SOT23-3]  266.7,78.49 270 top
Q118  MBT3904DW1T1  [SC70-6]  354.33,103.89 180 top
Q119  [SOT363_PHILIPS]  345.44,97.54 270 top
Q120  20V/4.2A/52mΩ/1.4W  [SOT23-3]  341.63,97.54 90 top
Q121  [SC70-6]  345.44,93.73 270 top
Q122  20V/4.2A/52mΩ/1.4W  [SOT23-3]  341.63,93.73 90 top
Q123  [SOT363_PHILIPS]  345.44,78.49 270 top
Q124  20V/4.2A/52mΩ/1.4W  [SOT23-3]  341.63,86.11 90 top
Q125  [SOT363_PHILIPS]  345.44,89.92 270 top
Q126  20V/4.2A/52mΩ/1.4W  [SOT23-3]  341.63,89.92 90 top
Q127  [SOT363_PHILIPS]  345.44,86.11 270 top
Q128  20V/4.2A/52mΩ/1.4W  [SOT23-3]  341.63,82.3 270 top
Q129  [SOT363_PHILIPS]  345.44,82.3 270 top
Q130  20V/4.2A/52mΩ/1.4W  [SOT23-3]  341.63,78.49 270 top
R1  10k  [0603]  69.85,44.96 0 top
R2  5.1k  [0603]  20.32,43.05 0 top
R3  5.1k  [0603]  20.32,54.48 0 top
R4  1k  [0603]  39.37,49.4 0 top
R5  1k  [0603]  39.37,46.86 0 top
R6  10k  [0603]  52.07,44.96 90 top
R7  10k  [0603]  57.15,44.96 270 top
R8  2.2k  [0603]  39.37,44.32 0 top
R9  4.7k  [0603]  39.37,51.94 0 top
R10  240  [0603]  33.02,41.15 90 top
R11  715  [0603]  30.48,41.15 270 top
R12  10k  [0603]  49.53,32.89 0 top
R13  10k  [0603]  49.53,36.7 0 top
R14  10k  [0603]  49.53,34.8 180 top
R15  10k  [0603]  49.53,40.51 180 top
R16  47k  [0603]  49.53,38.61 180 top
R17  100k  [0603]  49.53,19.56 180 top
R18  1M  [0603]  53.34,19.56 180 top
R19  100k  [0603]  49.53,30.99 180 top
R20  1M  [0603]  49.53,29.08 180 top
R21  1k  [0603]  39.37,41.78 180 top
R22  2.0k  [0603]  27.94,8.13 180 top
R23  10k  [0603]  60.96,11.94 270 top
R24  100k  [0603]  49.53,27.18 180 top